# Allegro board fmc_tlu_v1_09.brd
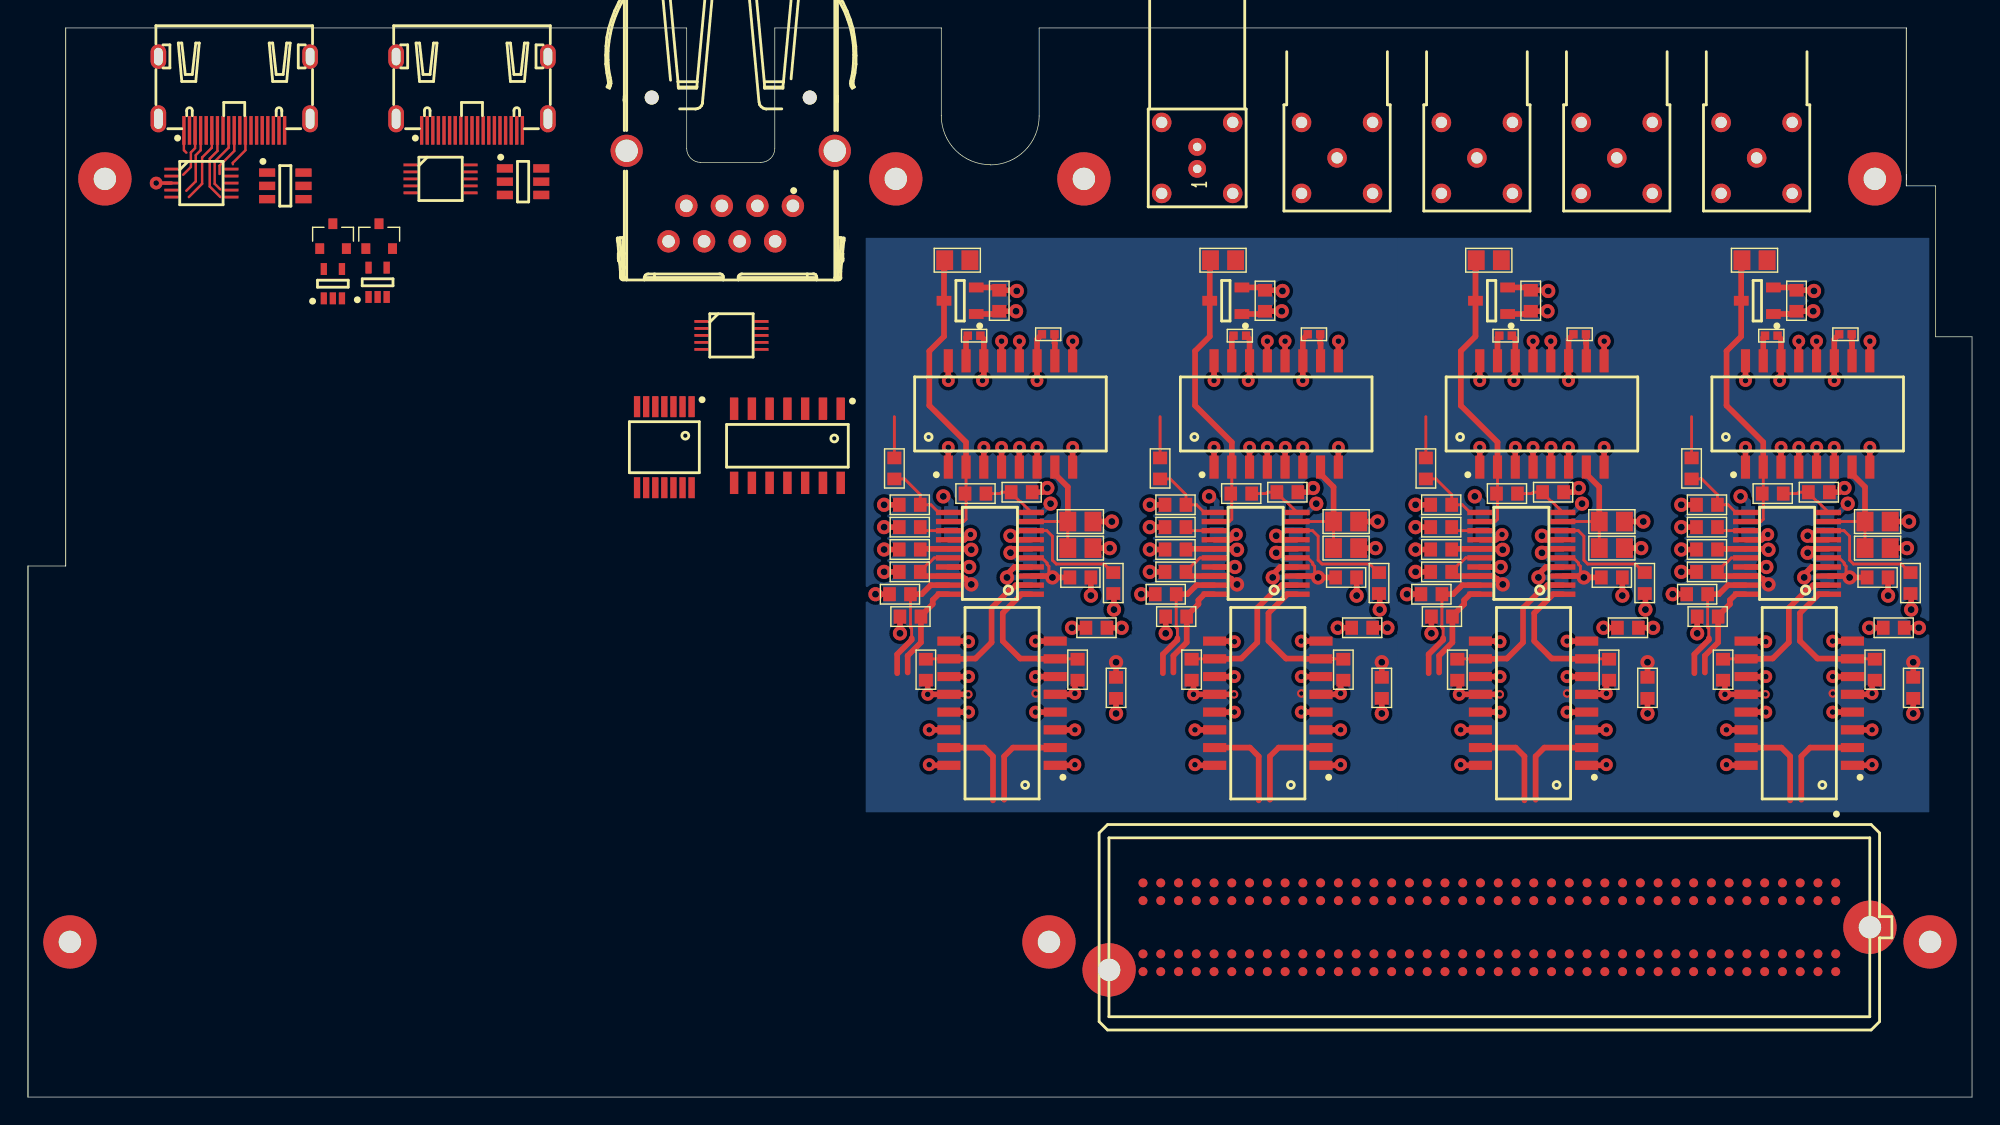
[diagram p0: board, top side]
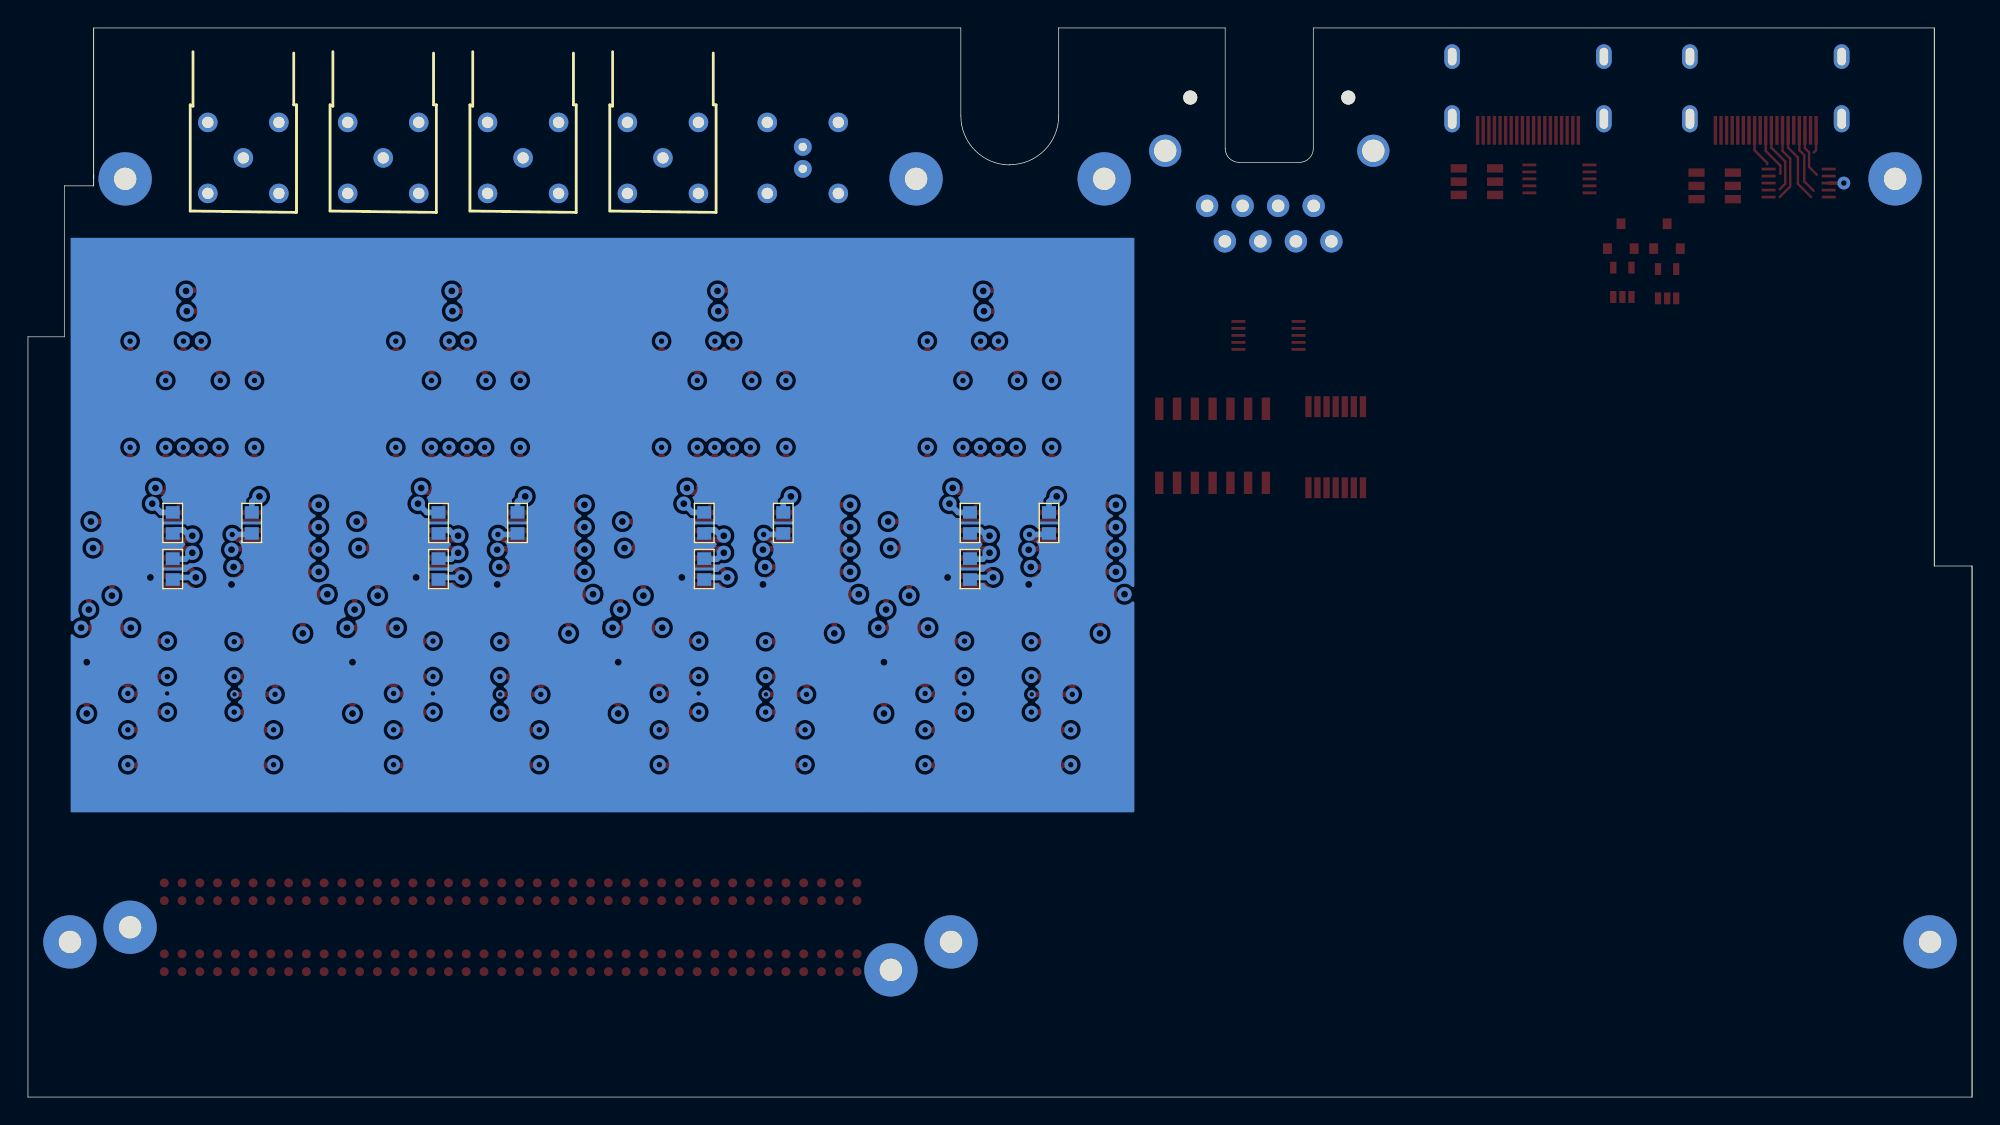
[diagram p1: board, bottom side, seen from below]

Outline 139 x 76.5 mm; copper layers: TOP, LAYER2, LAYER3, LAYER4, LAYER5, BOTTOM. Coordinates in mm from the lower left corner of the outline.
Outline path: 0,38 0,0 ; 0,38 2.7,38 ; 0,38 0,0 ; 0,0 139,0 139,54.4 136.4,54.4 136.4,65.2 134.3,65.2 ; 2.7,38 2.7,76.5 ; 2.7,38 2.7,76.5 ; 2.7,76.5 47.1,76.5 47.1,67.88 arc(47.39,67.17) 48.1,66.88 52.4,66.88 arc(53.1,67.17) 53.4,67.88 53.4,76.5 65.3,76.5 65.3,70.21 arc(66.33,67.74) 68.81,66.72 ; 134.3,76.5 72.3,76.5 72.3,70.2 arc(71.27,67.73) 68.8,66.7 ; 134.3,76.5 134.3,65.7 ; 134.3,76.5 134.3,65.2 ; 134.3,65.2 134.3,66

## Design rules (mm)
constraint set DEFAULT: min track width 0.17, pair gap 0.18
net group BEAM_TRIGGER: nets BEAM_TRIGGER<0> BEAM_TRIGGER<1> BEAM_TRIGGER<2> BEAM_TRIGGER<3>
net group BEAM_TRIGGER*: nets BEAM_TRIGGER*<0> BEAM_TRIGGER*<1> BEAM_TRIGGER*<2> BEAM_TRIGGER*<3>
net group BEAM_TRIGGER_CFD: nets BEAM_TRIGGER_CFD<0> BEAM_TRIGGER_CFD<1> BEAM_TRIGGER_CFD<2> BEAM_TRIGGER_CFD<3>
net group BEAM_TRIGGER_CFD*: nets BEAM_TRIGGER_CFD*<0> BEAM_TRIGGER_CFD*<1> BEAM_TRIGGER_CFD*<2> BEAM_TRIGGER_CFD*<3>
net group FMC_LA: nets FMC_LA<0> FMC_LA<1> FMC_LA<2> FMC_LA<3> FMC_LA<4> FMC_LA<5> FMC_LA<6> FMC_LA<7> FMC_LA<8> FMC_LA<9> FMC_LA<10> FMC_LA<11> FMC_LA<12> FMC_LA<13> FMC_LA<14> FMC_LA<15> FMC_LA<16> FMC_LA<17> FMC_LA<18> FMC_LA<19> FMC_LA<20> FMC_LA<21> FMC_LA<22> FMC_LA<23> FMC_LA<24> FMC_LA<25> FMC_LA<26> FMC_LA<27> FMC_LA<28> FMC_LA<29> FMC_LA<30> FMC_LA<31> FMC_LA<32> FMC_LA<33>
net group FMC_LA*: nets FMC_LA*<0> FMC_LA*<1> FMC_LA*<2> FMC_LA*<3> FMC_LA*<4> FMC_LA*<5> FMC_LA*<6> FMC_LA*<7> FMC_LA*<8> FMC_LA*<9> FMC_LA*<10> FMC_LA*<11> FMC_LA*<12> FMC_LA*<13> FMC_LA*<14> FMC_LA*<15> FMC_LA*<16> FMC_LA*<17> FMC_LA*<18> FMC_LA*<19> FMC_LA*<20> FMC_LA*<21> FMC_LA*<22> FMC_LA*<23> FMC_LA*<24> FMC_LA*<25> FMC_LA*<26> FMC_LA*<27> FMC_LA*<28> FMC_LA*<29> FMC_LA*<30> FMC_LA*<31> FMC_LA*<32> FMC_LA*<33>
net group IN: nets IN<0> IN<1> IN<2> IN<3>
net group VTHRESH: nets VTHRESH<0> VTHRESH<1> VTHRESH<2> VTHRESH<3>

## Placement (name value [footprint] x y rotation side)
C1_1  100nF  [C0603]  69.45 56.98 90 top
C1_2  100nF  [C0603]  88.45 56.98 90 top
C1_3  100nF  [C0603]  107.45 56.98 90 top
C1_4  100nF  [C0603]  126.45 56.98 90 top
C2_1  10nF  [C0603]  63.05 42.38 0 top
C2_2  10nF  [C0603]  82.05 42.38 0 top
C2_3  10nF  [C0603]  101.05 42.38 0 top
C2_4  10nF  [C0603]  120.05 42.38 0 top
C3_1  1.0uF  [C0603]  77.8 29.28 90 top
C3_2  1.0uF  [C0603]  96.8 29.28 90 top
C3_3  1.0uF  [C0603]  115.8 29.28 90 top
C3_4  1.0uF  [C0603]  134.8 29.28 90 top
C4_1  1.0uF  [C0603]  76.4 33.58 0 top
C4_2  1.0uF  [C0603]  95.4 33.58 0 top
C4_3  1.0uF  [C0603]  114.4 33.58 0 top
C4_4  1.0uF  [C0603]  133.4 33.58 0 top
C5_1  100nF  [C0603]  75.25 37.18 180 top
C5_2  100nF  [C0603]  94.25 37.18 180 top
C5_3  100nF  [C0603]  113.25 37.18 180 top
C5_4  100nF  [C0603]  132.25 37.18 180 top
C6_1  1.0uF  [C0603]  63.05 39.18 0 top
C6_2  1.0uF  [C0603]  82.05 39.18 0 top
C6_3  1.0uF  [C0603]  101.05 39.18 0 top
C6_4  1.0uF  [C0603]  120.05 39.18 0 top
C7_1  100nF  [C0603]  71.65 41.08 270 bottom
C7_2  100nF  [C0603]  90.65 41.08 270 bottom
C7_3  100nF  [C0603]  109.65 41.08 270 bottom
C7_4  100nF  [C0603]  128.65 41.08 270 bottom
C8_1  100nF  [C0603]  63.05 37.58 0 top
C8_2  100nF  [C0603]  82.05 37.58 0 top
C8_3  100nF  [C0603]  101.05 37.58 0 top
C8_4  100nF  [C0603]  120.05 37.58 0 top
C9_1  100nF  [C0603]  71.65 37.78 90 bottom
C9_2  100nF  [C0603]  90.65 37.78 90 bottom
C9_3  100nF  [C0603]  109.65 37.78 90 bottom
C9_4  100nF  [C0603]  128.65 37.78 90 bottom
C10_1  100nF  [C0603]  66 41.08 270 bottom
C10_2  100nF  [C0603]  85 41.08 270 bottom
C10_3  100nF  [C0603]  104 41.08 270 bottom
C10_4  100nF  [C0603]  123 41.08 270 bottom
D1_1  -  [SOT95P240X130-3N]  66.65 56.98 180 top
D1_2  -  [SOT95P240X130-3N]  85.65 56.98 180 top
D1_3  -  [SOT95P240X130-3N]  104.65 56.98 180 top
D1_4  -  [SOT95P240X130-3N]  123.65 56.98 180 top
IC1  -  [SOP65P640X120-14N]  45.5 46.5 270 top
IC1_1  -  [SOIC127P835X237-16N]  70.25 48.88 90 top
IC1_2  -  [SOIC127P835X237-16N]  89.25 48.88 90 top
IC1_3  -  [SOIC127P835X237-16N]  108.25 48.88 90 top
IC1_4  -  [SOIC127P835X237-16N]  127.25 48.88 90 top
IC2  -  [SOIC127P600X175-14N]  54.3 46.6 270 top
IC2_1  -  [TSSOP20MA_065]  71.75 35.98 90 top
IC2_2  -  [TSSOP20MA_065]  90.75 35.98 90 top
IC2_3  -  [TSSOP20MA_065]  109.75 35.98 90 top
IC2_4  -  [TSSOP20MA_065]  128.75 35.98 90 top
IC3  -  [SOT95P280X145-6N]  18.4 65.2 0 top
IC3_1  -  [SOIC127P835X237-16N]  69.65 28.18 180 top
IC3_2  -  [SOIC127P835X237-16N]  88.65 28.18 180 top
IC3_3  -  [SOIC127P835X237-16N]  107.65 28.18 180 top
IC3_4  -  [SOIC127P835X237-16N]  126.65 28.18 180 top
IC4  -  [SOT65P210X110-5N]  21.8 58.2 90 top
IC5  -  [SOT95P280X145-6N]  35.4 65.5 0 top
IC6  -  [SOT65P210X110-5N]  25 58.3 90 top
J1  -  [SAMTEC_MHDMI-19]  14.75 69.17 0 top
J2  -  [SAMTEC_MHDMI-19]  31.75 69.17 0 top
J3  -  [MOLEX_44661-1011]  50.25 68.86 270 top
J4  -  [SAMTEC_ASP-134606-01]  104.49 12.15 0 top
NOREF  -  [unnamed]  5.5 65.7 0 top
NOREF#2  -  [unnamed]  131.7 12.15 0 top
NOREF#3  -  [unnamed]  73 11.1 0 top
NOREF#4  -  [unnamed]  136 11.1 0 top
NOREF#5  -  [unnamed]  3 11.1 0 top
NOREF#6  -  [unnamed]  132.05 65.7 0 top
NOREF#7  -  [unnamed]  77.3 9.1 0 top
NOREF#8  -  [unnamed]  75.5 65.7 0 top
NOREF#9  -  [unnamed]  62.05 65.7 0 top
PX1  -  [LEMOEPG00_302]  83.6 66.56 90 top
PX2  -  [PLEMO80]  93.6 67.2 90 top
PX3  -  [PLEMO80]  103.6 67.2 90 top
PX4  -  [PLEMO80]  113.6 67.2 90 top
PX5  -  [PLEMO80]  123.6 67.2 90 top
R1_1  51  [C0402]  67.65 54.48 180 top
R1_2  51  [C0402]  86.65 54.48 180 top
R1_3  51  [C0402]  105.65 54.48 180 top
R1_4  51  [C0402]  124.65 54.48 180 top
R2_1  12  [C0805]  66.45 59.88 180 top
R2_2  12  [C0805]  85.45 59.88 180 top
R2_3  12  [C0805]  104.45 59.88 180 top
R2_4  12  [C0805]  123.45 59.88 180 top
R3_1  51  [C0603]  67.75 43.18 0 top
R3_2  51  [C0603]  86.75 43.18 0 top
R3_3  51  [C0603]  105.75 43.18 0 top
R3_4  51  [C0603]  124.75 43.18 0 top
R4_1  51  [C0402]  72.95 54.58 0 top
R4_2  51  [C0402]  91.95 54.58 0 top
R4_3  51  [C0402]  110.95 54.58 0 top
R4_4  51  [C0402]  129.95 54.58 0 top
R5_1  100  [C0603]  61.95 44.98 270 top
R5_2  100  [C0603]  80.95 44.98 270 top
R5_3  100  [C0603]  99.95 44.98 270 top
R5_4  100  [C0603]  118.95 44.98 270 top
R6_1  100  [C0805]  75.25 41.18 180 top
R6_2  100  [C0805]  94.25 41.18 180 top
R6_3  100  [C0805]  113.25 41.18 180 top
R6_4  100  [C0805]  132.25 41.18 180 top
R7_1  100  [C0603]  71.05 43.28 180 top
R7_2  100  [C0603]  90.05 43.28 180 top
R7_3  100  [C0603]  109.05 43.28 180 top
R7_4  100  [C0603]  128.05 43.28 180 top
R8_1  100  [C0805]  75.25 39.28 180 top
R8_2  100  [C0805]  94.25 39.28 180 top
R8_3  100  [C0805]  113.25 39.28 180 top
R8_4  100  [C0805]  132.25 39.28 180 top
R9_1  33k  [C0603]  63.05 40.78 0 top
R9_2  33k  [C0603]  82.05 40.78 0 top
R9_3  33k  [C0603]  101.05 40.78 0 top
R9_4  33k  [C0603]  120.05 40.78 0 top
R10_1  XX  [C0603]  77.6 36.78 90 top
R10_2  XX  [C0603]  96.6 36.78 90 top
R10_3  XX  [C0603]  115.6 36.78 90 top
R10_4  XX  [C0603]  134.6 36.78 90 top
R11_1  75  [C0603]  62.35 35.98 0 top
R11_2  75  [C0603]  81.35 35.98 0 top
R11_3  75  [C0603]  100.35 35.98 0 top
R11_4  75  [C0603]  119.35 35.98 0 top
R12_1  75  [C0603]  64.2 30.58 90 top
R12_2  75  [C0603]  83.2 30.58 90 top
R12_3  75  [C0603]  102.2 30.58 90 top
R12_4  75  [C0603]  121.2 30.58 90 top
R13_1  75  [C0603]  63.1 34.38 0 top
R13_2  75  [C0603]  82.1 34.38 0 top
R13_3  75  [C0603]  101.1 34.38 0 top
R13_4  75  [C0603]  120.1 34.38 0 top
R14_1  75  [C0603]  75.05 30.58 90 top
R14_2  75  [C0603]  94.05 30.58 90 top
R14_3  75  [C0603]  113.05 30.58 90 top
R14_4  75  [C0603]  132.05 30.58 90 top
T1  -  [SOT23]  21.8 61.6 90 top
T2  -  [SOT23]  25.1 61.6 90 top
U1  -  [SOT552-1]  12.4 65.4 0 top
U2  -  [SOT552-1]  50.3 54.5 0 top
U3  -  [SOT552-1]  29.5 65.7 0 top

## Library data of the parts
C1_1-C1_4 C5_1-C5_4 C7_1-C7_4 C8_1-C8_4 C9_1-C9_4 C10_1-C10_4 = CAPCERSMDCL2: part number: CAPCERSMDCL2_0603-100NF,16V; tolerance: 10%
C2_1-C2_4 = CAPCERSMDCL2: part number: CAPCERSMDCL2_0603-10NF,50V; tolerance: 10%
C3_1-C3_4 C4_1-C4_4 C6_1-C6_4 = CAPCERSMDCL2: part number: CAPCERSMDCL2_0603-1.0UF,6.3V; tolerance: 10%
D1_1-D1_4 = DIODE_DUAL_SERIES: part number: HBAT-540C
IC1 = AD5665R: part number: AD5665RBRUZ-1
IC1_1-IC1_4 = DELAY_LINE_GL2L: part number: GL2L5LS050D-C
IC2 = OPA4277: part number: OPA4277UA
IC2_1-IC2_4 = MAX9601
IC3 IC5 = USBLC6-2: part number: USBLC6-2SC6
IC3_1-IC3_4 = DELAY_LINE_GL2L: part number: GL2L5LS100D-C
IC4 IC6 = 74LVC1G07: part number: SN74LVC1G07DCK
J1 J2 = CON19P: part number: MHDMI-19-02-H-TH-L-TR
J3 = CON8P: part number: CON8P-MOLEX_44661-1011
J4 = CON160P_40CDGH: part number: ASP-134606-01
PX1 = PLEMO2CI: part number: PLEMO2CI-PLEMO2-00B
PX2-PX5 = PCOAX: part number: PCOAX-PLEMO00C
R1_1-R1_4 R4_1-R4_4 = RSMD0402: part number: RSMD0402_1/16W-51,1%; tolerance: 1%
R2_1-R2_4 = RSMD0805: part number: RSMD0805_125MW-12,1%; tolerance: 1%
R3_1-R3_4 = RSMD0603: part number: RSMD0603_1/10W-51,1%; tolerance: 1%
R5_1-R5_4 R7_1-R7_4 = RSMD0603: part number: RSMD0603_1/10W-100,1%; tolerance: 1%
R6_1-R6_4 R8_1-R8_4 = RSMD0805: part number: RSMD0805_125MW-100,1%; tolerance: 1%
R9_1-R9_4 = RSMD0603: part number: RSMD0603_1/10W-33K,1%; tolerance: 1%
R10_1-R10_4 = RSMD0603: part number: RSMD0603_1/10W-XX,1%; tolerance: 1%
R11_1-R11_4 R12_1-R12_4 R13_1-R13_4 R14_1-R14_4 = RSMD0603: part number: RSMD0603_1/10W-75,1%; tolerance: 1%
T1 T2 = TRANS MOSFET: part number: TRANS MOSFET_GSD-FDV301N,SOT23
U1-U3 = PRTR5V0U8S: part number: PRTR5V0U8S_TSSOP-NXP

## Footprints (pads in the part's own frame, mm; a bottom-side part is the same pattern mirrored in y, then rotated)
C0402
  rect 0.6x0.6 smd: 1(-0.45,0) 2(0.45,0)
C0603
  rect 0.9x1 smd: 1(-0.75,0) 2(0.75,0)
C0805
  rect 1.2x1.4 smd: 1(-0.9,0) 2(0.9,0)
LEMOEPG00_302
  round 1.27 hole 0.6: 1(-0.15,0) 2(1.42,0)
  round 1.397 hole 0.813: 3(-1.905,-2.54) 4(3.175,-2.54) 5(3.175,2.54) 6(-1.905,2.54)
MOLEX_44661-1011
  round 1 hole 3.25 unplated: (-2.66,5.65) (-2.66,-5.65)
  round 1.6 hole 0.9: 1(5.09,4.445) 2(7.63,3.175) 3(5.09,1.905) 4(7.63,0.635) 5(5.09,-0.635) 6(7.63,-1.905) 7(5.09,-3.175) 8(7.63,-4.445)
  round 2.301 hole 1.6: 9(1.15,7.44) 10(1.15,-7.44)
PLEMO80
  round 1.397 hole 0.813: 1(0,0) 2(2.54,-2.54) 3(2.54,2.54) 4(-2.54,2.54) 5(-2.54,-2.54)
SAMTEC_ASP-134606-01
  round 1.001 hole 1.3 unplated: (-27.19,-3.05) (27.19,0)
  round 0.64 smd: C1(24.765,3.175) C2(23.495,3.175) C3(22.225,3.175) C4(20.955,3.175) C5(19.685,3.175) C6(18.415,3.175) C7(17.145,3.175) C8(15.875,3.175) C9(14.605,3.175) C10(13.335,3.175) C11(12.065,3.175) C12(10.795,3.175) C13(9.525,3.175) C14(8.255,3.175) C15(6.985,3.175) C16(5.715,3.175) C17(4.445,3.175) C18(3.175,3.175) C19(1.905,3.175) C20(0.635,3.175) C21(-0.635,3.175) C22(-1.905,3.175) C23(-3.175,3.175) C24(-4.445,3.175) C25(-5.715,3.175) C26(-6.985,3.175) C27(-8.255,3.175) C28(-9.525,3.175) C29(-10.795,3.175) C30(-12.065,3.175) C31(-13.335,3.175) C32(-14.605,3.175) C33(-15.875,3.175) C34(-17.145,3.175) C35(-18.415,3.175) C36(-19.685,3.175) C37(-20.955,3.175) C38(-22.225,3.175) C39(-23.495,3.175) C40(-24.765,3.175) D1(24.765,1.905) D2(23.495,1.905) D3(22.225,1.905) D4(20.955,1.905) D5(19.685,1.905) D6(18.415,1.905) D7(17.145,1.905) D8(15.875,1.905) D9(14.605,1.905) D10(13.335,1.905) D11(12.065,1.905) D12(10.795,1.905) D13(9.525,1.905) D14(8.255,1.905) D15(6.985,1.905) D16(5.715,1.905) D17(4.445,1.905) D18(3.175,1.905) D19(1.905,1.905) D20(0.635,1.905) D21(-0.635,1.905) D22(-1.905,1.905) D23(-3.175,1.905) D24(-4.445,1.905) D25(-5.715,1.905) D26(-6.985,1.905) D27(-8.255,1.905) D28(-9.525,1.905) D29(-10.795,1.905) D30(-12.065,1.905) D31(-13.335,1.905) D32(-14.605,1.905) D33(-15.875,1.905) D34(-17.145,1.905) D35(-18.415,1.905) D36(-19.685,1.905) D37(-20.955,1.905) D38(-22.225,1.905) D39(-23.495,1.905) D40(-24.765,1.905) G1(24.765,-1.905) G2(23.495,-1.905) G3(22.225,-1.905) G4(20.955,-1.905) G5(19.685,-1.905) G6(18.415,-1.905) G7(17.145,-1.905) G8(15.875,-1.905) G9(14.605,-1.905) G10(13.335,-1.905) G11(12.065,-1.905) G12(10.795,-1.905) G13(9.525,-1.905) G14(8.255,-1.905) G15(6.985,-1.905) G16(5.715,-1.905) G17(4.445,-1.905) G18(3.175,-1.905) G19(1.905,-1.905) G20(0.635,-1.905) G21(-0.635,-1.905) G22(-1.905,-1.905) G23(-3.175,-1.905) G24(-4.445,-1.905) G25(-5.715,-1.905) G26(-6.985,-1.905) G27(-8.255,-1.905) G28(-9.525,-1.905) G29(-10.795,-1.905) G30(-12.065,-1.905) G31(-13.335,-1.905) G32(-14.605,-1.905) G33(-15.875,-1.905) G34(-17.145,-1.905) G35(-18.415,-1.905) G36(-19.685,-1.905) G37(-20.955,-1.905) G38(-22.225,-1.905) G39(-23.495,-1.905) G40(-24.765,-1.905) H1(24.765,-3.175) H2(23.495,-3.175) H3(22.225,-3.175) H4(20.955,-3.175) H5(19.685,-3.175) H6(18.415,-3.175) H7(17.145,-3.175) H8(15.875,-3.175) H9(14.605,-3.175) H10(13.335,-3.175) H11(12.065,-3.175) H12(10.795,-3.175) H13(9.525,-3.175) H14(8.255,-3.175) H15(6.985,-3.175) H16(5.715,-3.175) H17(4.445,-3.175) H18(3.175,-3.175) H19(1.905,-3.175) H20(0.635,-3.175) H21(-0.635,-3.175) H22(-1.905,-3.175) H23(-3.175,-3.175) H24(-4.445,-3.175) H25(-5.715,-3.175) H26(-6.985,-3.175) H27(-8.255,-3.175) H28(-9.525,-3.175) H29(-10.795,-3.175) H30(-12.065,-3.175) H31(-13.335,-3.175) H32(-14.605,-3.175) H33(-15.875,-3.175) H34(-17.145,-3.175) H35(-18.415,-3.175) H36(-19.685,-3.175) H37(-20.955,-3.175) H38(-22.225,-3.175) H39(-23.495,-3.175) H40(-24.765,-3.175)
SAMTEC_MHDMI-19
  rect 0.24x2.05 smd: 1(-3.6,0) 2(-3.2,0) 3(-2.8,0) 4(-2.4,0) 5(-2,0) 6(-1.6,0) 7(-1.2,0) 8(-0.8,0) 9(-0.4,0) 10(0,0) 11(0.4,0) 12(0.8,0) 13(1.2,0) 14(1.6,0) 15(2,0) 16(2.4,0) 17(2.8,0) 18(3.2,0) 19(3.6,0)
  oval 1.12x1.94 hole 0.62x1.44: 20(-5.425,0.83) 21(5.425,0.83)
  oval 1.12x1.76 hole 0.62x1.26: 22(-5.425,5.28) 23(5.425,5.28)
SOIC127P600X175-14N
  rect 1.6x0.6 smd: 1(-2.65,3.81) 2(-2.65,2.54) 3(-2.65,1.27) 4(-2.65,0) 5(-2.65,-1.27) 6(-2.65,-2.54) 7(-2.65,-3.81) 8(2.65,-3.81) 9(2.65,-2.54) 10(2.65,-1.27) 11(2.65,0) 12(2.65,1.27) 13(2.65,2.54) 14(2.65,3.81)
SOIC127P835X237-16N
  rect 1.65x0.65 smd: 1(-3.8,4.445) 2(-3.8,3.175) 3(-3.8,1.905) 4(-3.8,0.635) 5(-3.8,-0.635) 6(-3.8,-1.905) 7(-3.8,-3.175) 8(-3.8,-4.445) 9(3.8,-4.445) 10(3.8,-3.175) 11(3.8,-1.905) 12(3.8,-0.635) 13(3.8,0.635) 14(3.8,1.905) 15(3.8,3.175) 16(3.8,4.445)
SOP65P640X120-14N
  rect 1.5x0.45 smd: 1(-2.9,1.95) 2(-2.9,1.3) 3(-2.9,0.65) 4(-2.9,0) 5(-2.9,-0.65) 6(-2.9,-1.3) 7(-2.9,-1.95) 8(2.9,-1.95) 9(2.9,-1.3) 10(2.9,-0.65) 11(2.9,0) 12(2.9,0.65) 13(2.9,1.3) 14(2.9,1.95)
SOT23
  rect 0.762x0.635 smd: 1(-0.889,0.94) 2(-0.889,-0.965) 3(0.889,0)
SOT65P210X110-5N
  rect 0.85x0.45 smd: 1(-1.05,0.65) 2(-1.05,0) 3(-1.05,-0.65) 4(1.05,-0.65) 5(1.05,0.65)
SOT95P240X130-3N
  rect 1.05x0.7 smd: 1(-1.15,0.95) 2(-1.15,-0.95) 3(1.15,0)
SOT95P280X145-6N
  rect 1.15x0.6 smd: 1(-1.3,0.95) 2(-1.3,0) 3(-1.3,-0.95) 4(1.3,-0.95) 5(1.3,0) 6(1.3,0.95)
SOT552-1
  rect 1x0.2 smd: 1(-2.15,1) 2(-2.15,0.5) 3(-2.15,0) 4(-2.15,-0.5) 5(-2.15,-1) 6(2.15,-1) 7(2.15,-0.5) 8(2.15,0) 9(2.15,0.5) 10(2.15,1)
TSSOP20MA_065
  rect 0.381x1.778 smd: 1(0,0) 2(0.65,0) 3(1.3,0) 4(1.95,0) 5(2.6,0) 6(3.25,0) 7(3.9,0) 8(4.55,0) 9(5.2,0) 10(5.85,0) 11(5.85,5.94) 12(5.2,5.94) 13(4.55,5.94) 14(3.9,5.94) 15(3.25,5.94) 16(2.6,5.94) 17(1.95,5.94) 18(1.3,5.94) 19(0.65,5.94) 20(0,5.94)
unnamed
  round 3.81 hole 1.6: (0,0)

## Nets
GND_HDMI1: J1.20 J1.21 J1.22 J1.23
GND_HDMI2: J2.20 J2.21 J2.22 J2.23
GND_SIGNAL: C2_1.1(A<0>) C2_2.1(A<0>) C2_3.1(A<0>) C2_4.1(A<0>) C3_1.1(A<0>) C3_2.1(A<0>) C3_3.1(A<0>) C3_4.1(A<0>) C4_1.1(A<0>) C4_2.1(A<0>) C4_3.1(A<0>) C4_4.1(A<0>) C5_1.1(A<0>) C5_2.1(A<0>) C5_3.1(A<0>) C5_4.1(A<0>) C6_1.1(A<0>) C6_2.1(A<0>) C6_3.1(A<0>) C6_4.1(A<0>) C7_1.1(A<0>) C7_2.1(A<0>) C7_3.1(A<0>) C7_4.1(A<0>) C8_1.1(A<0>) C8_2.1(A<0>) C8_3.1(A<0>) C8_4.1(A<0>) C9_1.1(A<0>) C9_2.1(A<0>) C9_3.1(A<0>) C9_4.1(A<0>) C10_1.1(A<0>) C10_2.1(A<0>) C10_3.1(A<0>) C10_4.1(A<0>) IC1.1(LDAC*) IC1.2(ADDR1) IC1.8(ADDR2) IC1.12 IC1_1.1(SH<0>) IC1_1.3(SH<1>) IC1_1.4(SH<2>) IC1_1.5(SH<3>) IC1_1.6(SH<4>) IC1_1.8(SH<5>) IC1_1.9(SH<6>) IC1_1.11(SH<7>) IC1_1.12(SH<8>) IC1_1.13(SH<9>) IC1_1.14(SH<10>) IC1_1.16(SH<11>) IC1_2.1(SH<0>) IC1_2.3(SH<1>) IC1_2.4(SH<2>) IC1_2.5(SH<3>) IC1_2.6(SH<4>) IC1_2.8(SH<5>) IC1_2.9(SH<6>) IC1_2.11(SH<7>) IC1_2.12(SH<8>) IC1_2.13(SH<9>) IC1_2.14(SH<10>) IC1_2.16(SH<11>) IC1_3.1(SH<0>) IC1_3.3(SH<1>) IC1_3.4(SH<2>) IC1_3.5(SH<3>) IC1_3.6(SH<4>) IC1_3.8(SH<5>) IC1_3.9(SH<6>) IC1_3.11(SH<7>) IC1_3.12(SH<8>) IC1_3.13(SH<9>) IC1_3.14(SH<10>) IC1_3.16(SH<11>) IC1_4.1(SH<0>) IC1_4.3(SH<1>) IC1_4.4(SH<2>) IC1_4.5(SH<3>) IC1_4.6(SH<4>) IC1_4.8(SH<5>) IC1_4.9(SH<6>) IC1_4.11(SH<7>) IC1_4.12(SH<8>) IC1_4.13(SH<9>) IC1_4.14(SH<10>) IC1_4.16(SH<11>) IC2_1.4(LE<0>) IC2_1.17(LE<0>) IC2_2.4(LE<0>) IC2_2.17(LE<0>) IC2_3.4(LE<0>) IC2_3.17(LE<0>) IC2_4.4(LE<0>) IC2_4.17(LE<0>) IC3.2(GND) IC3_1.1(SH<0>) IC3_1.3(SH<1>) IC3_1.4(SH<2>) IC3_1.5(SH<3>) IC3_1.6(SH<4>) IC3_1.8(SH<5>) IC3_1.9(SH<6>) IC3_1.11(SH<7>) IC3_1.12(SH<8>) IC3_1.13(SH<9>) IC3_1.14(SH<10>) IC3_1.16(SH<11>) IC3_2.1(SH<0>) IC3_2.3(SH<1>) IC3_2.4(SH<2>) IC3_2.5(SH<3>) IC3_2.6(SH<4>) IC3_2.8(SH<5>) IC3_2.9(SH<6>) IC3_2.11(SH<7>) IC3_2.12(SH<8>) IC3_2.13(SH<9>) IC3_2.14(SH<10>) IC3_2.16(SH<11>) IC3_3.1(SH<0>) IC3_3.3(SH<1>) IC3_3.4(SH<2>) IC3_3.5(SH<3>) IC3_3.6(SH<4>) IC3_3.8(SH<5>) IC3_3.9(SH<6>) IC3_3.11(SH<7>) IC3_3.12(SH<8>) IC3_3.13(SH<9>) IC3_3.14(SH<10>) IC3_3.16(SH<11>) IC3_4.1(SH<0>) IC3_4.3(SH<1>) IC3_4.4(SH<2>) IC3_4.5(SH<3>) IC3_4.6(SH<4>) IC3_4.8(SH<5>) IC3_4.9(SH<6>) IC3_4.11(SH<7>) IC3_4.12(SH<8>) IC3_4.13(SH<9>) IC3_4.14(SH<10>) IC3_4.16(SH<11>) IC4.3 IC5.2(GND) IC6.3 J1.2(A<1>) J1.5(A<4>) J1.8(A<7>) J1.11(A<10>) J1.17(A<16>) J2.2(A<1>) J2.5(A<4>) J2.8(A<7>) J2.11(A<10>) J2.17(A<16>) J4.C1(C<1>) J4.C4(C<4>) J4.C5(C<5>) J4.C8(C<8>) J4.C9(C<9>) J4.C12(C<12>) J4.C13(C<13>) J4.C16(C<16>) J4.C17(C<17>) J4.C20(C<20>) J4.C21(C<21>) J4.C24(C<24>) J4.C25(C<25>) J4.C28(C<28>) J4.C29(C<29>) J4.C32(C<32>) J4.C33(C<33>) J4.C36(C<36>) J4.C38(C<38>) J4.C40(C<40>) J4.D2(D<2>) J4.D3(D<3>) J4.D6(D<6>) J4.D7(D<7>) J4.D10(D<10>) J4.D13(D<13>) J4.D16(D<16>) J4.D19(D<19>) J4.D22(D<22>) J4.D25(D<25>) J4.D28(D<28>) J4.D37(D<37>) J4.D39(D<39>) J4.G1(G<1>) J4.G4(G<4>) J4.G5(G<5>) J4.G8(G<8>) J4.G11(G<11>) J4.G14(G<14>) J4.G17(G<17>) J4.G20(G<20>) J4.G23(G<23>) J4.G26(G<26>) J4.G29(G<29>) J4.G32(G<32>) J4.G35(G<35>) J4.G38(G<38>) J4.G40(G<40>) J4.H3(H<3>) J4.H6(H<6>) J4.H9(H<9>) J4.H12(H<12>) J4.H15(H<15>) J4.H18(H<18>) J4.H21(H<21>) J4.H24(H<24>) J4.H27(H<27>) J4.H30(H<30>) J4.H33(H<33>) J4.H36(H<36>) J4.H39(H<39>) PX1.3 PX1.4 PX1.5 PX1.6 PX2.2 PX2.3 PX2.4 PX2.5 PX3.2 PX3.3 PX3.4 PX3.5 PX4.2 PX4.3 PX4.4 PX4.5 PX5.2 PX5.3 PX5.4 PX5.5 R1_1.1(A<0>) R1_2.1(A<0>) R1_3.1(A<0>) R1_4.1(A<0>) R4_1.1(A<0>) R4_2.1(A<0>) R4_3.1(A<0>) R4_4.1(A<0>) R6_1.1(A<0>) R6_2.1(A<0>) R6_3.1(A<0>) R6_4.1(A<0>) R7_1.1(A<0>) R7_2.1(A<0>) R7_3.1(A<0>) R7_4.1(A<0>) R8_1.1(A<0>) R8_2.1(A<0>) R8_3.1(A<0>) R8_4.1(A<0>) R9_1.1(A<0>) R9_2.1(A<0>) R9_3.1(A<0>) R9_4.1(A<0>) R10_1.1(A<0>) R10_2.1(A<0>) R10_3.1(A<0>) R10_4.1(A<0>) R11_1.1(A<0>) R11_2.1(A<0>) R11_3.1(A<0>) R11_4.1(A<0>) R12_1.1(A<0>) R12_2.1(A<0>) R12_3.1(A<0>) R12_4.1(A<0>) R13_1.1(A<0>) R13_2.1(A<0>) R13_3.1(A<0>) R13_4.1(A<0>) R14_1.1(A<0>) R14_2.1(A<0>) R14_3.1(A<0>) R14_4.1(A<0>)
P2V5: C3_1.2(B<0>) C3_2.2(B<0>) C3_3.2(B<0>) C3_4.2(B<0>) C5_1.2(B<0>) C5_2.2(B<0>) C5_3.2(B<0>) C5_4.2(B<0>) C8_1.2(B<0>) C8_2.2(B<0>) C8_3.2(B<0>) C8_4.2(B<0>) IC2_1.3(VCCO_<0>) IC2_1.5(LE*<0>) IC2_1.16(LE*<0>) IC2_1.18(VCCO_<1>) IC2_2.3(VCCO_<0>) IC2_2.5(LE*<0>) IC2_2.16(LE*<0>) IC2_2.18(VCCO_<1>) IC2_3.3(VCCO_<0>) IC2_3.5(LE*<0>) IC2_3.16(LE*<0>) IC2_3.18(VCCO_<1>) IC2_4.3(VCCO_<0>) IC2_4.5(LE*<0>) IC2_4.16(LE*<0>) IC2_4.18(VCCO_<1>) IC3.5(VBUS) IC4.5 IC5.5(VBUS) IC6.5 J4.G39(G<39>) J4.H40(H<40>)
P3V3: IC1.3 IC1.6(POR) IC1.9(CLR*) J4.C39(C<39>) J4.D32(D<32>) J4.D36(D<36>) J4.D38(D<38>) J4.D40(D<40>) T1.3(D) T2.3(D)
P5V: C1_1.2(B<0>) C1_2.2(B<0>) C1_3.2(B<0>) C1_4.2(B<0>) C4_1.2(B<0>) C4_2.2(B<0>) C4_3.2(B<0>) C4_4.2(B<0>) C7_1.2(B<0>) C7_2.2(B<0>) C7_3.2(B<0>) C7_4.2(B<0>) C10_1.2(B<0>) C10_2.2(B<0>) C10_3.2(B<0>) C10_4.2(B<0>) D1_1.2(C) D1_2.2(C) D1_3.2(C) D1_4.2(C) IC2.4(V+) IC2_1.7(VCC<0>) IC2_1.14(VCC<1>) IC2_2.7(VCC<0>) IC2_2.14(VCC<1>) IC2_3.7(VCC<0>) IC2_3.14(VCC<1>) IC2_4.7(VCC<0>) IC2_4.14(VCC<1>)
P12V: J4.C35(C<35>) J4.C37(C<37>)
VBUS: U1.8 U2.8 U3.8
BEAM_TRIGGER*<0>: IC2_4.19(Q*<0>) R11_4.2(B<0>)
BEAM_TRIGGER*<1>: IC2_3.19(Q*<0>) R11_3.2(B<0>)
BEAM_TRIGGER*<2>: IC2_2.19(Q*<0>) R11_2.2(B<0>)
BEAM_TRIGGER*<3>: IC2_1.19(Q*<0>) R11_1.2(B<0>)
BEAM_TRIGGER<0>: IC2_4.20(Q<0>) R13_4.2(B<0>)
BEAM_TRIGGER<1>: IC2_3.20(Q<0>) R13_3.2(B<0>)
BEAM_TRIGGER<2>: IC2_2.20(Q<0>) R13_2.2(B<0>)
BEAM_TRIGGER<3>: IC2_1.20(Q<0>) R13_1.2(B<0>)
BEAM_TRIGGER_CFD*<0>: IC3_4.15(A2)
BEAM_TRIGGER_CFD*<1>: IC3_3.15(A2)
BEAM_TRIGGER_CFD*<2>: IC3_2.15(A2)
BEAM_TRIGGER_CFD*<3>: IC3_1.15(A2)
BEAM_TRIGGER_CFD<0>: IC3_4.2(A1)
BEAM_TRIGGER_CFD<1>: IC3_3.2(A1)
BEAM_TRIGGER_CFD<2>: IC3_2.2(A1)
BEAM_TRIGGER_CFD<3>: IC3_1.2(A1)
BUS_GND: U1.3 U2.3 U3.3
BUSY0: J3.6(A<5>) U2.4(IN)
BUSY0*: J3.3(A<2>) U2.7(IN)
BUSY1: J1.7(A<6>) U1.6(IN)
BUSY1*: J1.9(A<8>) U1.7(IN)
BUSY2: J2.7(A<6>) U3.7(IN)
BUSY2*: J2.9(A<8>) U3.6(IN)
CLK1: J1.3(A<2>) U1.2(IN)
CLK1*: J1.1(A<0>) U1.1(IN)
CLK2: J2.3(A<2>) U3.4(IN)
CLK2*: J2.1(A<0>) U3.5(IN)
CONT0: J3.5(A<4>) U2.10(IN)
CONT0*: J3.4(A<3>) U2.6(IN)
CONT1: J1.4(A<3>) U1.4(IN)
CONT1*: J1.6(A<5>)
CONT2: J2.4(A<3>) U3.1(IN)
CONT2*: J2.6(A<5>) U3.2(IN)
DP0_C2M: J4.C2(C<2>)
DP0_C2M*: J4.C3(C<3>)
DP0_M2C: J4.C6(C<6>)
DP0_M2C*: J4.C7(C<7>)
DUT_CLK0: J3.2(A<1>) U2.9(IN)
DUT_CLK0*: J3.1(A<0>)
FMC_CLK1_M2C: J4.G2(G<2>)
FMC_CLK1_M2C*: J4.G3(G<3>)
FMC_LA*<0>: J4.G7(G<7>)
FMC_LA*<1>: J4.D9(D<9>)
FMC_LA*<2>: J4.H8(H<8>)
FMC_LA*<3>: J4.G10(G<10>)
FMC_LA*<4>: J4.H11(H<11>)
FMC_LA*<5>: J4.D12(D<12>)
FMC_LA*<6>: J4.C11(C<11>)
FMC_LA*<7>: J4.H14(H<14>)
FMC_LA*<8>: J4.G13(G<13>)
FMC_LA*<9>: J4.D15(D<15>)
FMC_LA*<10>: J4.C15(C<15>)
FMC_LA*<11>: J4.H17(H<17>)
FMC_LA*<12>: J4.G16(G<16>)
FMC_LA*<13>: J4.D18(D<18>)
FMC_LA*<14>: J4.C19(C<19>)
FMC_LA*<15>: J4.H20(H<20>)
FMC_LA*<16>: J4.G19(G<19>)
FMC_LA*<17>: J4.D21(D<21>)
FMC_LA*<18>: J4.C23(C<23>)
FMC_LA*<19>: J4.H23(H<23>)
FMC_LA*<20>: J4.G22(G<22>)
FMC_LA*<21>: J4.H26(H<26>)
FMC_LA*<22>: J4.G25(G<25>)
FMC_LA*<23>: J4.D24(D<24>)
FMC_LA*<24>: J4.H29(H<29>)
FMC_LA*<25>: J4.G28(G<28>)
FMC_LA*<26>: J4.D27(D<27>)
FMC_LA*<27>: J4.C27(C<27>)
FMC_LA*<28>: J4.H32(H<32>)
FMC_LA*<29>: J4.G31(G<31>)
FMC_LA*<30>: J4.H35(H<35>)
FMC_LA*<31>: J4.G34(G<34>)
FMC_LA*<32>: J4.H38(H<38>)
FMC_LA*<33>: J4.G37(G<37>)
FMC_LA<0>: J4.G6(G<6>)
FMC_LA<1>: J4.D8(D<8>)
FMC_LA<2>: J4.H7(H<7>)
FMC_LA<3>: J4.G9(G<9>)
FMC_LA<4>: J4.H10(H<10>)
FMC_LA<5>: J4.D11(D<11>)
FMC_LA<6>: J4.C10(C<10>)
FMC_LA<7>: J4.H13(H<13>)
FMC_LA<8>: J4.G12(G<12>)
FMC_LA<9>: J4.D14(D<14>)
FMC_LA<10>: J4.C14(C<14>)
FMC_LA<11>: J4.H16(H<16>)
FMC_LA<12>: J4.G15(G<15>)
FMC_LA<13>: J4.D17(D<17>)
FMC_LA<14>: J4.C18(C<18>)
FMC_LA<15>: J4.H19(H<19>)
FMC_LA<16>: J4.G18(G<18>)
FMC_LA<17>: J4.D20(D<20>)
FMC_LA<18>: J4.C22(C<22>)
FMC_LA<19>: J4.H22(H<22>)
FMC_LA<20>: J4.G21(G<21>)
FMC_LA<21>: J4.H25(H<25>)
FMC_LA<22>: J4.G24(G<24>)
FMC_LA<23>: J4.D23(D<23>)
FMC_LA<24>: J4.H28(H<28>)
FMC_LA<25>: J4.G27(G<27>)
FMC_LA<26>: J4.D26(D<26>)
FMC_LA<27>: J4.C26(C<26>)
FMC_LA<28>: J4.H31(H<31>)
FMC_LA<29>: J4.G30(G<30>)
FMC_LA<30>: J4.H34(H<34>)
FMC_LA<31>: J4.G33(G<33>)
FMC_LA<32>: J4.H37(H<37>)
FMC_LA<33>: J4.G36(G<36>)
FMC_PRSNT_M2C_L: J4.H2(H<2>)
FMC_PWR_GOOD_FLASH_RST_B: J4.D1(D<1>)
FMC_TCK_BUF: J4.D29(D<29>)
FMC_TDO: J4.D31(D<31>)
FMC_TMS_BUF: J4.D33(D<33>)
FPGA_TDO: J4.D30(D<30>)
FRAME: J3.9 J3.10
GA0: J4.C34(C<34>)
GA1: J4.D35(D<35>)
GBTCLK0_M2C: J4.D4(D<4>)
GBTCLK0_M2C*: J4.D5(D<5>)
HDMI_POWER_ENABLE1: IC4.2(A)
HDMI_POWER_ENABLE2: IC6.2(A)
IN<0>: PX5.1(A) R2_4.1(A<0>)
IN<1>: PX4.1(A) R2_3.1(A<0>)
IN<2>: PX3.1(A) R2_2.1(A<0>)
IN<3>: PX2.1(A) R2_1.1(A<0>)
M5V: C1_1.1(A<0>) C1_2.1(A<0>) C1_3.1(A<0>) C1_4.1(A<0>) C6_1.2(B<0>) C6_2.2(B<0>) C6_3.2(B<0>) C6_4.2(B<0>) C9_1.2(B<0>) C9_2.2(B<0>) C9_3.2(B<0>) C9_4.2(B<0>) D1_1.1(A) D1_2.1(A) D1_3.1(A) D1_4.1(A) IC2.11(V-) IC2_1.6(VEE<0>) IC2_1.15(VEE<1>) IC2_2.6(VEE<0>) IC2_2.15(VEE<1>) IC2_3.6(VEE<0>) IC2_3.15(VEE<1>) IC2_4.6(VEE<0>) IC2_4.15(VEE<1>)
SCL: IC1.14(SCL) J4.C30(C<30>)
SDA: IC1.13(SDA) J4.C31(C<31>)
SIG7: U1.5(IN)
SIG7_1: U2.5(IN)
SPARE1: J1.10(A<9>) U1.9(IN)
SPARE1*: J1.12(A<11>) U1.10(IN)
SPARE2: J2.10(A<9>) U3.9(IN)
SPARE2*: J2.12(A<11>) U3.10(IN)
TRIG0: J3.8(A<7>) U2.1(IN)
TRIG0*: J3.7(A<6>) U2.2(IN)
TRIG1: IC3.1(I/O11) IC3.3(I/O12) J1.15(A<14>)
TRIG1*: IC3.4(I/O22) IC3.6(I/O21) J1.16(A<15>)
TRIG2: IC5.1(I/O11) IC5.3(I/O12) J2.15(A<14>)
TRIG2*: IC5.4(I/O22) IC5.6(I/O21) J2.16(A<15>)
TRST_L: J4.D34(D<34>)
UNNAMED_1_AD5665R_I63_VOUTA: IC1.4(VOUTA) IC2.3(PIN<0>)
UNNAMED_1_AD5665R_I63_VOUTB: IC1.11(VOUTB) IC2.12(PIN<0>)
UNNAMED_1_AD5665R_I63_VOUTC: IC1.5(VOUTC) IC2.5(PIN<0>)
UNNAMED_1_AD5665R_I63_VOUTD: IC1.10(VOUTD) IC2.10(PIN<0>)
UNNAMED_1_CAPCERSMDCL2_I78_B_1: C2_1.2(B<0>) IC2_1.11(IN+<0>) R5_1.2(B<0>)
UNNAMED_1_CAPCERSMDCL2_I78_B_2: C2_2.2(B<0>) IC2_2.11(IN+<0>) R5_2.2(B<0>)
UNNAMED_1_CAPCERSMDCL2_I78_B_3: C2_3.2(B<0>) IC2_3.11(IN+<0>) R5_3.2(B<0>)
UNNAMED_1_CAPCERSMDCL2_I78_B_4: C2_4.2(B<0>) IC2_4.11(IN+<0>) R5_4.2(B<0>)
UNNAMED_1_DELAYLINEGL2L_I14_1_1: IC1_1.15(A2) R1_1.2(B<0>)
UNNAMED_1_DELAYLINEGL2L_I14_1_2: IC1_2.15(A2) R1_2.2(B<0>)
UNNAMED_1_DELAYLINEGL2L_I14_1_3: IC1_3.15(A2) R1_3.2(B<0>)
UNNAMED_1_DELAYLINEGL2L_I14_1_4: IC1_4.15(A2) R1_4.2(B<0>)
UNNAMED_1_DELAYLINEGL2L_I14_2_1: IC1_1.10(B2) R4_1.2(B<0>)
UNNAMED_1_DELAYLINEGL2L_I14_2_2: IC1_2.10(B2) R4_2.2(B<0>)
UNNAMED_1_DELAYLINEGL2L_I14_2_3: IC1_3.10(B2) R4_3.2(B<0>)
UNNAMED_1_DELAYLINEGL2L_I14_2_4: IC1_4.10(B2) R4_4.2(B<0>)
UNNAMED_1_DELAYLINEGL2L_I140__1: D1_1.3(AC) IC1_1.2(A1) IC2_1.12(IN-<0>) R2_1.2(B<0>) R3_1.1(A<0>)
UNNAMED_1_DELAYLINEGL2L_I140__2: D1_2.3(AC) IC1_2.2(A1) IC2_2.12(IN-<0>) R2_2.2(B<0>) R3_2.1(A<0>)
UNNAMED_1_DELAYLINEGL2L_I140__3: D1_3.3(AC) IC1_3.2(A1) IC2_3.12(IN-<0>) R2_3.2(B<0>) R3_3.1(A<0>)
UNNAMED_1_DELAYLINEGL2L_I140__4: D1_4.3(AC) IC1_4.2(A1) IC2_4.12(IN-<0>) R2_4.2(B<0>) R3_4.1(A<0>)
UNNAMED_1_MAX9601_I1_HYS_1: IC2_1.8(HYS<0>) R10_1.2(B<0>)
UNNAMED_1_MAX9601_I1_HYS_2: IC2_2.8(HYS<0>) R10_2.2(B<0>)
UNNAMED_1_MAX9601_I1_HYS_3: IC2_3.8(HYS<0>) R10_3.2(B<0>)
UNNAMED_1_MAX9601_I1_HYS_4: IC2_4.8(HYS<0>) R10_4.2(B<0>)
UNNAMED_1_MAX9601_I1_IN_1: IC2_1.10(IN+<0>) R3_1.2(B<0>) R7_1.2(B<0>)
UNNAMED_1_MAX9601_I1_IN_1_1: IC1_1.7(B1) IC2_1.9(IN-<0>) R6_1.2(B<0>) R8_1.2(B<0>)
UNNAMED_1_MAX9601_I1_IN_1_2: IC1_2.7(B1) IC2_2.9(IN-<0>) R6_2.2(B<0>) R8_2.2(B<0>)
UNNAMED_1_MAX9601_I1_IN_1_3: IC1_3.7(B1) IC2_3.9(IN-<0>) R6_3.2(B<0>) R8_3.2(B<0>)
UNNAMED_1_MAX9601_I1_IN_1_4: IC1_4.7(B1) IC2_4.9(IN-<0>) R6_4.2(B<0>) R8_4.2(B<0>)
UNNAMED_1_MAX9601_I1_IN_2: IC2_2.10(IN+<0>) R3_2.2(B<0>) R7_2.2(B<0>)
UNNAMED_1_MAX9601_I1_IN_3: IC2_3.10(IN+<0>) R3_3.2(B<0>) R7_3.2(B<0>)
UNNAMED_1_MAX9601_I1_IN_4: IC2_4.10(IN+<0>) R3_4.2(B<0>) R7_4.2(B<0>)
UNNAMED_1_MAX9601_I1_Q_1: IC2_1.2(Q*<0>) IC3_1.10(B2) R12_1.2(B<0>)
UNNAMED_1_MAX9601_I1_Q_1_1: IC2_1.1(Q<0>) IC3_1.7(B1) R14_1.2(B<0>)
UNNAMED_1_MAX9601_I1_Q_1_2: IC2_2.1(Q<0>) IC3_2.7(B1) R14_2.2(B<0>)
UNNAMED_1_MAX9601_I1_Q_1_3: IC2_3.1(Q<0>) IC3_3.7(B1) R14_3.2(B<0>)
UNNAMED_1_MAX9601_I1_Q_1_4: IC2_4.1(Q<0>) IC3_4.7(B1) R14_4.2(B<0>)
UNNAMED_1_MAX9601_I1_Q_2: IC2_2.2(Q*<0>) IC3_2.10(B2) R12_2.2(B<0>)
UNNAMED_1_MAX9601_I1_Q_3: IC2_3.2(Q*<0>) IC3_3.10(B2) R12_3.2(B<0>)
UNNAMED_1_MAX9601_I1_Q_4: IC2_4.2(Q*<0>) IC3_4.10(B2) R12_4.2(B<0>)
UNNAMED_1_MAX9601_I71_HYS_1: IC2_1.13(HYS<0>) R9_1.2(B<0>)
UNNAMED_1_MAX9601_I71_HYS_2: IC2_2.13(HYS<0>) R9_2.2(B<0>)
UNNAMED_1_MAX9601_I71_HYS_3: IC2_3.13(HYS<0>) R9_3.2(B<0>)
UNNAMED_1_MAX9601_I71_HYS_4: IC2_4.13(HYS<0>) R9_4.2(B<0>)
UNNAMED_1_OPA4277_I22_MIN: IC2.2(MIN<0>)
UNNAMED_1_OPA4277_I22_MIN_1: IC2.9(MIN<0>)
UNNAMED_1_OPA4277_I22_MIN_2: IC2.6(MIN<0>)
UNNAMED_1_OPA4277_I22_MIN_3: IC2.13(MIN<0>)
UNNAMED_1_PC036AFMCLPCCONNECT_1: J4.H5(H<5>) PX1.2(B)
UNNAMED_1_PC036AFMCLPCCONNECTOR: J4.H4(H<4>) PX1.1(A)
UNNAMED_4_74LVC1G07_I28_Y: IC4.4(Y) T1.1(G)
UNNAMED_4_74LVC1G07_I40_Y: IC6.4(Y) T2.1(G)
UNNAMED_4_CON19P_I2_A: J1.14(A<13>) T1.2(S)
UNNAMED_4_CON19P_I3_A: J2.14(A<13>) T2.2(S)
VREF: IC1.7(VREFIN/VREFOUT)
VREF_A_M2C: J4.H1(H<1>)
VTHRESH<0>: IC2.1(OUT<0>) R5_4.1(A<0>)
VTHRESH<1>: IC2.14(OUT<0>) R5_3.1(A<0>)
VTHRESH<2>: IC2.7(OUT<0>) R5_2.1(A<0>)
VTHRESH<3>: IC2.8(OUT<0>) R5_1.1(A<0>)

Pads without a net: IC4 1; IC6 1; J1 13 18 19; J2 13 18 19

## Via types
v1: diameter 0.914, hole 0.406, TOP to BOTTOM, 101 vias
v2: diameter 1.016, hole 0.5, TOP to BOTTOM, 104 vias
v3: diameter 0.61, hole 0.33, TOP to BOTTOM, 8 vias

## Routing (per net, layer and track width the routed paths; a pad name or vN(x,y) marks a point on that pad's centre or on a via; arc(x,y) is an arc through that point)
GND_SIGNAL: length 259.8
  TOP w0.4: v3(67.23,28.81) IC3_1.12 v1(64.33,28.81) 64.33,29.7 R12_1.1 ; C8_2.1 v2(80.21,37.58) ; C5_4.1 v2(133,35.88) ; IC2_2.4 89.53,37.93 89,37.4 v2(89,37.18) ; IC1_4.6 129.15,46.48 129.15,46.48 v1(129.15,46.49) ; IC3_4.8 v1(129.04,32.62) ; IC3_3.4 v1(110.04,27.55) ; 65.85,26.27 v1(64.44,26.27) ; v1(68.25,51.27) 68.25,51.28 68.34,51.38 IC1_1.14 68.34,54.23 R1_1.1 ; 111.45,23.73 112.6,23.73 112.65,23.78 v1(112.86,23.78) ; IC1_1.1 v1(65.8,46.49) ; IC1_3.16 v1(103.8,51.27) ; IC2_1.4 70.53,37.93 70,37.4 v2(70,37.18) ; C2_2.1 v2(80.21,42.38) ; IC1_3.1 v1(103.8,46.49) ; v1(110.15,51.27) 110.15,52.68 IC1_3.11 110.15,54.23 R4_3.1 ; IC1_1.3 68.34,46.38 68.35,46.38 v1(68.35,46.49) ; 122.85,26.27 v1(121.44,26.27) ; IC1_1.4 v1(69.61,46.49) ; v1(102.44,23.78) 102.65,23.78 102.69,23.73 103.85,23.73 ; R10_1.1 77.6,35.84 77.65,35.79 v2(77.65,34.88) ; R12_3.1 102.33,29.7 v1(102.33,28.81) IC3_3.12 v3(105.23,28.81) ; v1(125.25,51.27) 125.25,51.28 125.34,51.38 IC1_4.14 125.34,54.23 R1_4.1 ; R12_2.1 83.33,29.7 v1(83.33,28.81) IC3_2.12 v3(86.23,28.81) ; R6_4.1 v2(134.5,41.18) ; v2(134.65,34.88) 134.65,35.79 134.6,35.84 R10_4.1 ; v1(93.7,46.49) 93.7,46.38 93.69,46.38 IC1_2.8 ; v1(74.7,46.49) 74.7,46.38 74.69,46.38 IC1_1.8 ; R4_1.1 72.15,54.23 IC1_1.11 72.15,52.68 v1(72.15,51.27) ; v1(125.35,46.49) 125.35,46.38 125.34,46.38 IC1_4.3 ; v1(64.44,23.78) 64.65,23.78 64.69,23.73 65.85,23.73 ; C8_4.1 v2(118.21,37.58) ; R14_4.1 131.86,29.64 v1(131.86,28.88) 131.6,28.88 131.53,28.81 IC3_4.5 ; C2_4.1 v2(118.21,42.38) ; v1(83.44,23.78) 83.65,23.78 83.69,23.73 84.85,23.73 ; v1(106.25,51.27) 106.25,51.28 106.34,51.38 IC1_3.14 106.34,54.23 R1_3.1 ; v1(124.26,32.58) 124,32.58 123.95,32.62 IC3_4.9 ; IC1_3.12 v1(108.88,54.09) ; IC1_2.3 87.34,46.38 87.35,46.38 v1(87.35,46.49) ; IC3_1.6 v1(72.04,30.09) ; IC1_1.6 72.15,46.48 72.15,46.48 v1(72.15,46.49) ; IC3_1.9 66.95,32.62 67,32.58 v1(67.26,32.58) ; R4_4.1 129.15,54.23 IC1_4.11 129.15,52.68 v1(129.15,51.27) ; IC1_1.5 70.88,46.37 70.9,46.38 v1(70.9,46.49) ; IC2_3.17 v2(105.3,37.93) ; C8_3.1 v2(99.21,37.58) ; IC1_4.5 127.88,46.37 127.9,46.38 v1(127.9,46.49) ; R13_4.1 v2(119.35,33.18) ; R11_2.1 v2(79.6,35.98) ; IC1_4.8 131.69,46.38 131.7,46.38 v1(131.7,46.49) ; IC3_1.13 v1(67.26,27.55) ; IC3_4.4 v1(129.04,27.55) ; C2_3.1 v2(99.21,42.38) ; IC1_3.3 106.34,46.38 106.35,46.38 v1(106.35,46.49) ; IC1_4.16 v1(122.8,51.27) ; R1_2.1 87.34,54.23 IC1_2.14 87.34,51.38 87.25,51.28 v1(87.25,51.27) ; R11_3.1 v2(98.6,35.98) ; C3_3.1 v2(115.8,27.45) ; IC1_1.12 v1(70.88,54.09) ; IC1_3.8 112.69,46.38 112.7,46.38 v1(112.7,46.49) ; IC3_1.4 v1(72.04,27.55) ; IC1_3.6 110.15,46.48 110.15,46.48 v1(110.15,46.49) ; C6_3.1 v2(99.21,39.18) ; R7_4.1 129.5,43.28 129.8,43.58 v2(129.88,43.58) ; IC1_4.1 v1(122.8,46.49) ; IC2_4.17 v2(124.3,37.93) ; R6_3.1 v2(115.5,41.18) ; v1(93.7,54.09) 93.7,53.98 93.69,53.98 IC1_2.9 ; IC3_4.13 v1(124.26,27.55) ; 122.85,23.73 121.69,23.73 121.65,23.78 v1(121.44,23.78) ; C4_3.1 v2(112.65,33.58) ; IC2_2.17 v2(86.3,37.93) ; v1(108.9,46.49) 108.9,46.38 108.88,46.37 IC1_3.5 ; C6_4.1 v2(118.21,39.18) ; R7_3.1 110.5,43.28 110.8,43.58 v2(110.88,43.58) ; IC3_3.9 104.95,32.62 105,32.58 v1(105.26,32.58) ; R8_4.1 v2(134.35,39.28) ; v3(124.23,28.81) IC3_4.12 v1(121.33,28.81) 121.33,29.7 R12_4.1 ; IC1_1.9 74.69,53.98 74.7,53.98 v1(74.7,54.09) ; R14_2.1 93.86,29.64 v1(93.86,28.88) 93.6,28.88 93.53,28.81 IC3_2.5 ; 130.45,23.73 131.6,23.73 131.65,23.78 v1(131.86,23.78) ; IC1_4.9 131.69,53.98 131.7,53.98 v1(131.7,54.09) ; IC3_2.11 v1(86.26,30.09) ; R9_2.1 v2(80.21,40.78) ; C2_1.1 v2(61.21,42.38) ; IC3_3.11 v1(105.26,30.09) ; v1(91.15,51.27) 91.15,52.68 IC1_2.11 91.15,54.23 R4_2.1 ; C8_1.1 v2(61.21,37.58) ; R11_4.1 v2(117.6,35.98) ; IC3_3.6 v1(110.04,30.09) ; v1(93.86,23.78) 93.65,23.78 93.6,23.73 92.45,23.73 ; C5_2.1 v2(95,35.88) ; IC1_4.12 v1(127.88,54.09) ; 130.45,26.27 v1(131.86,26.27) ; C6_1.1 v2(61.21,39.18) ; R6_1.1 v2(77.5,41.18) ; R14_3.1 112.86,29.64 v1(112.86,28.88) 112.6,28.88 112.53,28.81 IC3_3.5 ; IC1_2.4 v1(88.61,46.49) ; IC1_2.16 v1(84.8,51.27) ; v1(91.15,46.49) 91.15,46.48 91.15,46.48 IC1_2.6 ; v2(96.65,34.88) 96.65,35.79 96.6,35.84 R10_2.1 ; IC1_2.1 v1(84.8,46.49) ; C5_1.1 v2(76,35.88) ; IC3_4.6 v1(129.04,30.09) ; IC1_3.4 v1(107.61,46.49) ; IC2_1.17 v2(67.3,37.93) ; v2(91.88,43.58) 91.8,43.58 91.5,43.28 R7_2.1 ; 73.45,23.73 74.6,23.73 74.65,23.78 v1(74.86,23.78) ; R9_1.1 v2(61.21,40.78) ; IC1_2.5 89.88,46.37 89.9,46.38 v1(89.9,46.49) ; 73.45,26.27 v1(74.86,26.27) ; 111.45,26.27 v1(112.86,26.27) ; R13_2.1 v2(81.35,33.18) ; R6_2.1 v2(96.5,41.18) ; IC3_2.13 v1(86.26,27.55) ; R14_1.1 74.86,29.64 v1(74.86,28.88) 74.6,28.88 74.53,28.81 IC3_1.5 ; IC1_4.13 v1(126.61,54.09) ; C3_4.1 v2(134.8,27.45) ; R7_1.1 72.5,43.28 72.8,43.58 v2(72.88,43.58) ; IC3_2.6 v1(91.04,30.09) ; IC1_2.12 v1(89.88,54.09) ; IC3_4.11 v1(124.26,30.09) ; C6_2.1 v2(80.21,39.18) ; IC1_3.9 112.69,53.98 112.7,53.98 v1(112.7,54.09) ; R11_1.1 v2(60.6,35.98) ; 103.85,26.27 v1(102.44,26.27) ; IC1_1.13 v1(69.61,54.09) ; IC3_1.11 v1(67.26,30.09) ; 92.45,26.27 v1(93.86,26.27) ; IC3_3.8 v1(110.04,32.62) ; IC3_2.9 85.95,32.62 86,32.58 v1(86.26,32.58) ; R13_1.1 v2(62.35,33.18) ; R9_3.1 v2(99.21,40.78) ; R8_3.1 v2(115.35,39.28) ; C3_2.1 v2(96.8,27.45) ; C5_3.1 v2(114,35.88) ; R8_2.1 v2(96.35,39.28) ; IC2_4.4 127.53,37.93 127,37.4 v2(127,37.18) ; IC3_2.4 v1(91.04,27.55) ; IC2_3.4 108.53,37.93 108,37.4 v2(108,37.18) ; 84.85,26.27 v1(83.44,26.27) ; R10_3.1 115.6,35.84 115.65,35.79 v2(115.65,34.88) ; R9_4.1 v2(118.21,40.78) ; IC3_2.8 v1(91.04,32.62) ; R8_1.1 v2(77.35,39.28) ; IC3_1.8 v1(72.04,32.62) ; IC1_3.13 v1(107.61,54.09) ; IC1_2.13 v1(88.61,54.09) ; C3_1.1 v2(77.8,27.45) ; C4_4.1 v2(131.65,33.58) ; IC3_3.13 v1(105.26,27.55) ; IC1_4.4 v1(126.61,46.49) ; R13_3.1 v2(100.35,33.18) ; C4_2.1 v2(93.65,33.58) ; IC1_1.16 v1(65.8,51.27) ; C4_1.1 v2(74.65,33.58)
  BOTTOM w0.4: v2(73.11,42.46) 72.48,41.83 C7_1.1 ; C9_1.1 71.5,37.18 v2(70,37.18) ; v2(84.45,42.98) 84.62,42.98 85,42.61 C10_2.1 ; v2(111.11,42.46) 110.48,41.83 C7_3.1 ; C9_4.1 128.5,37.18 v2(127,37.18) ; C7_2.1 91.48,41.83 v2(92.11,42.46) ; v2(122.45,42.98) 122.62,42.98 123,42.61 C10_4.1 ; v2(103.45,42.98) 103.62,42.98 104,42.61 C10_3.1 ; C9_3.1 109.5,37.18 v2(108,37.18) ; C9_2.1 90.5,37.18 v2(89,37.18) ; C10_1.1 66,42.61 65.62,42.98 v2(65.45,42.98) ; C7_4.1 129.48,41.83 v2(130.11,42.46)
P2V5: length 56.9
  TOP w0.2: IC2_2.5 91.5,38.58 91.86,38.21 91.86,38.11 92,37.98 92,37.43 v2(92.25,37.18) ; IC2_4.16 121.8,38.58 121.46,38.24 121.41,38.24 120.8,37.63 ; IC2_3.5 110.5,38.58 110.86,38.21 110.86,38.11 111,37.98 111,37.43 v2(111.25,37.18) ; IC2_3.16 102.8,38.58 102.46,38.24 102.41,38.24 101.8,37.63 ; 82.8,37.63 83.41,38.24 83.46,38.24 83.8,38.58 IC2_2.16 ; 63.8,37.63 64.41,38.24 64.46,38.24 64.8,38.58 IC2_1.16 ; IC2_1.5 72.5,38.58 72.86,38.21 72.86,38.11 73,37.98 73,37.43 v2(73.25,37.18) ; v2(130.25,37.18) 130,37.43 130,37.98 129.86,38.11 129.86,38.21 129.5,38.58 IC2_4.5
  TOP w0.4: 101.8,37.63 C8_3.2 102.1,37.28 IC2_3.18 104.77,37.28 104.95,37.09 105.03,37.09 v2(105.45,36.68) ; v2(86.45,36.68) 86.03,37.09 85.95,37.09 85.77,37.28 IC2_2.18 83.1,37.28 C8_2.2 82.8,37.63 ; C5_2.2 v2(92.25,37.18) 91.96,37.18 91.86,37.28 IC2_2.3 ; C5_1.2 v2(73.25,37.18) 72.96,37.18 72.86,37.28 IC2_1.3 ; v2(96.8,31.12) C3_2.2 ; 120.8,37.63 C8_4.2 121.1,37.28 IC2_4.18 123.77,37.28 123.95,37.09 124.03,37.09 v2(124.45,36.68) ; v2(77.8,31.12) C3_1.2 ; 63.8,37.63 C8_1.2 64.1,37.28 IC2_1.18 66.77,37.28 66.95,37.09 67.03,37.09 v2(67.45,36.68) ; IC2_4.3 129.86,37.28 129.96,37.18 v2(130.25,37.18) C5_4.2 ; v2(115.8,31.12) C3_3.2 ; C5_3.2 v2(111.25,37.18) 110.96,37.18 110.86,37.28 IC2_3.3 ; v2(134.8,31.12) C3_4.2
  BOTTOM w0.4: 73.45,28.88 v3(72.05,28.88) ; 111.45,28.88 v3(110.05,28.88) ; 130.45,28.88 v3(129.05,28.88) ; 92.45,28.88 v3(91.05,28.88)
P5V: length 42.1
  TOP w0.4: v2(108.25,40.16) 108.53,39.88 IC2_3.7 ; IC2_4.7 127.53,39.88 v2(127.25,40.16) ; v2(70.7,57.68) 70.65,57.73 C1_1.2 69.25,57.93 D1_1.2 ; D1_3.2 107.25,57.93 C1_3.2 108.65,57.73 v2(108.7,57.68) ; v2(70.25,40.16) 70.53,39.88 IC2_1.7 ; C4_3.2 v2(116.2,33.58) ; IC2_2.7 89.53,39.88 v2(89.25,40.16) ; v1(105.4,40.25) 105.16,40.02 105.1,40.02 104.97,39.88 IC2_3.14 ; v1(86.4,40.25) 86.16,40.02 86.1,40.02 85.97,39.88 IC2_2.14 ; IC2_1.14 66.97,39.88 67.1,40.02 67.16,40.02 v1(67.4,40.25) ; v2(127.7,57.68) 127.65,57.73 C1_4.2 126.25,57.93 D1_4.2 ; C4_1.2 v2(78.2,33.58) ; IC2_4.14 123.97,39.88 124.1,40.02 124.16,40.02 v1(124.4,40.25) ; D1_2.2 88.25,57.93 C1_2.2 89.65,57.73 v2(89.7,57.68) ; C4_2.2 v2(97.2,33.58) ; C4_4.2 v2(135.2,33.58)
  BOTTOM w0.4: v2(127.25,40.16) 127.48,40.16 127.9,40.58 128.4,40.58 C7_4.2 ; C10_2.2 85.07,40.25 v1(86.4,40.25) ; C10_1.2 66.07,40.25 v1(67.4,40.25) ; v2(108.25,40.16) 108.48,40.16 108.9,40.58 109.4,40.58 C7_3.2 ; C7_2.2 90.4,40.58 89.9,40.58 89.48,40.16 v2(89.25,40.16) ; C10_3.2 104.07,40.25 v1(105.4,40.25) ; C10_4.2 123.07,40.25 v1(124.4,40.25) ; C7_1.2 71.4,40.58 70.9,40.58 70.48,40.16 v2(70.25,40.16)
BEAM_TRIGGER*<0>: length 9.1
  TOP w0.2: 120.18,32.83 120.18,33.53 120.1,33.61 R11_4.2
  TOP w0.4: R11_4.2 120.9,35.98 121.55,36.63 IC2_4.19 ; 120.18,32.83 120.18,32.71 119.15,31.68 119.15,30.33
BEAM_TRIGGER*<1>: length 9.1
  TOP w0.2: R11_3.2 101.1,33.61 101.18,33.53 101.18,32.83
  TOP w0.4: IC2_3.19 102.55,36.63 101.9,35.98 R11_3.2 ; 101.18,32.83 101.18,32.71 100.15,31.68 100.15,30.33
BEAM_TRIGGER*<2>: length 9.1
  TOP w0.2: 82.18,32.83 82.18,33.53 82.1,33.61 R11_2.2
  TOP w0.4: IC2_2.19 83.55,36.63 82.9,35.98 R11_2.2 ; 82.18,32.83 82.18,32.71 81.15,31.68 81.15,30.33
BEAM_TRIGGER*<3>: length 9.1
  TOP w0.2: 63.18,32.83 63.18,33.53 63.1,33.61 R11_1.2
  TOP w0.4: 62.15,30.33 62.15,31.68 63.18,32.71 63.18,32.83 ; IC2_1.19 64.55,36.63 63.9,35.98 R11_1.2
BEAM_TRIGGER<0>: length 7.2
  TOP w0.4: 119.9,30.38 119.9,31.58 120.85,32.53 R13_4.2 120.85,34.43 121.69,35.27 121.69,35.56 122.11,35.98 IC2_4.20
BEAM_TRIGGER<1>: length 7.2
  TOP w0.4: 100.9,30.38 100.9,31.58 101.85,32.53 R13_3.2 101.85,34.43 102.69,35.27 102.69,35.56 103.11,35.98 IC2_3.20
BEAM_TRIGGER<2>: length 7.2
  TOP w0.4: IC2_2.20 84.11,35.98 83.69,35.56 83.69,35.27 82.85,34.43 R13_2.2 82.85,32.53 81.9,31.58 81.9,30.38
BEAM_TRIGGER<3>: length 7.2
  TOP w0.4: 62.9,30.38 62.9,31.58 63.85,32.53 R13_1.2 63.85,34.43 64.69,35.27 64.69,35.56 65.11,35.98 IC2_1.20
BEAM_TRIGGER_CFD*<0>: length 6.6
  TOP w0.4: 126,21.23 126,24.38 125.37,25 IC3_4.15
BEAM_TRIGGER_CFD*<1>: length 6.6
  TOP w0.4: 107,21.23 107,24.38 106.37,25 IC3_3.15
BEAM_TRIGGER_CFD*<2>: length 6.6
  TOP w0.4: 88,21.23 88,24.38 87.37,25 IC3_2.15
BEAM_TRIGGER_CFD*<3>: length 6.6
  TOP w0.4: IC3_1.15 68.37,25 69,24.38 69,21.23
BEAM_TRIGGER_CFD<0>: length 7
  TOP w0.4: IC3_4.2 127.42,25 126.8,24.38 126.8,21.28
BEAM_TRIGGER_CFD<1>: length 7
  TOP w0.4: 107.8,21.28 107.8,24.38 108.42,25 IC3_3.2
BEAM_TRIGGER_CFD<2>: length 7
  TOP w0.4: 88.8,21.28 88.8,24.38 89.42,25 IC3_2.2
BEAM_TRIGGER_CFD<3>: length 7
  TOP w0.4: IC3_1.2 70.42,25 69.8,24.38 69.8,21.28
BUS_GND: length 1.1
  TOP w0.25: U1.3 v1(9.17,65.4)
BUSY1: length 5.3
  TOP w0.17: J1.7 13.55,67.7 13,67.15 13,65.15 13.75,64.4
BUSY1*: length 4.8
  TOP w0.17: 13.75,64.95 13.35,65.35 13.35,66.94 14.35,67.93 J1.9
CLK1: length 3.5
  TOP w0.17: 11.1,66 11.65,66.55 11.65,67.6 11.95,67.9 J1.3
CLK1*: length 1.7
  TOP w0.17: 11.32,67.58 11.15,67.75 J1.1
CONT1: length 4.7
  TOP w0.17: 11.32,64.85 12,65.52 12,67.4 12.35,67.75 J1.4
CONT1*: length 5.5
  TOP w0.17: 11.5,64.4 12.45,65.35 12.45,67.24 13.15,67.93 J1.6
M5V: length 39.4
  TOP w0.4: C6_1.2 63.85,39.23 IC2_1.15 67.38,39.23 v2(67.45,39.16) ; C6_2.2 82.85,39.23 IC2_2.15 86.38,39.23 v2(86.45,39.16) ; v2(108.25,38.95) 108.53,39.23 IC2_3.6 ; IC2_4.6 127.53,39.23 v2(127.25,38.95) ; D1_4.1 125.97,56.03 126.25,56.11 126.37,56.23 C1_4.1 v2(127.65,56.23) ; v2(89.25,38.95) 89.53,39.23 IC2_2.6 ; v2(124.45,39.16) 124.38,39.23 IC2_4.15 120.85,39.23 C6_4.2 ; D1_1.1 68.97,56.03 69.25,56.11 69.37,56.23 C1_1.1 v2(70.65,56.23) ; v2(70.25,38.95) 70.53,39.23 IC2_1.6 ; D1_3.1 106.97,56.03 107.25,56.11 107.37,56.23 C1_3.1 v2(108.65,56.23) ; C6_3.2 101.85,39.23 IC2_3.15 105.38,39.23 v2(105.45,39.16) ; D1_2.1 87.97,56.03 88.25,56.11 88.37,56.23 C1_2.1 v2(89.65,56.23)
  BOTTOM w0.4: C9_4.2 128.6,38.48 127.75,38.48 127.28,38.95 v2(127.25,38.95) ; v2(108.25,38.95) 108.28,38.95 108.75,38.48 109.6,38.48 C9_3.2 ; v2(70.25,38.95) 70.28,38.95 70.75,38.48 71.6,38.48 C9_1.2 ; v2(89.25,38.95) 89.28,38.95 89.75,38.48 90.6,38.48 C9_2.2
SPARE1: length 3.6
  TOP w0.17: J1.10 14.75,67.7 13.7,66.65 13.7,66.05
SPARE1*: length 2.8
  TOP w0.17: 14.65,66.75 14.65,66.85 15.55,67.75 J1.12
UNNAMED_1_CAPCERSMDCL2_I78_B_1: length 5.3
  TOP w0.2: R5_1.2 62.67,44.23 63.8,43.11 C2_1.2 64.56,42.38 65.11,41.83 IC2_1.11
UNNAMED_1_CAPCERSMDCL2_I78_B_2: length 5.3
  TOP w0.2: R5_2.2 81.67,44.23 82.8,43.11 C2_2.2 83.56,42.38 84.11,41.83 IC2_2.11
UNNAMED_1_CAPCERSMDCL2_I78_B_3: length 5.3
  TOP w0.2: R5_3.2 100.67,44.23 101.8,43.11 C2_3.2 102.56,42.38 103.11,41.83 IC2_3.11
UNNAMED_1_CAPCERSMDCL2_I78_B_4: length 5.3
  TOP w0.2: R5_4.2 119.67,44.23 120.8,43.11 C2_4.2 121.56,42.38 122.11,41.83 IC2_4.11
UNNAMED_1_DELAYLINEGL2L_I14_1_1: length 1.9
  TOP w0.4: IC1_1.15 67.07,54.36 R1_1.2
UNNAMED_1_DELAYLINEGL2L_I14_1_2: length 1.9
  TOP w0.4: R1_2.2 86.07,54.36 IC1_2.15
UNNAMED_1_DELAYLINEGL2L_I14_1_3: length 1.9
  TOP w0.4: R1_3.2 105.07,54.36 IC1_3.15
UNNAMED_1_DELAYLINEGL2L_I14_1_4: length 1.9
  TOP w0.4: IC1_4.15 124.07,54.36 R1_4.2
UNNAMED_1_DELAYLINEGL2L_I14_2_1: length 1.9
  TOP w0.4: R4_1.2 73.4,53.95 73.42,53.93 IC1_1.10
UNNAMED_1_DELAYLINEGL2L_I14_2_2: length 1.9
  TOP w0.4: IC1_2.10 92.42,53.93 92.4,53.95 R4_2.2
UNNAMED_1_DELAYLINEGL2L_I14_2_3: length 1.9
  TOP w0.4: IC1_3.10 111.42,53.93 111.4,53.95 R4_3.2
UNNAMED_1_DELAYLINEGL2L_I14_2_4: length 1.9
  TOP w0.4: R4_4.2 130.4,53.95 130.42,53.93 IC1_4.10
UNNAMED_1_DELAYLINEGL2L_I140__1: length 21.5
  TOP w0.2: IC2_1.12 66.91,41.18 67.07,41.34 67.07,43.26 ; 67.07,43.26 IC1_1.2 ; 67.07,43.26 R3_1.1
  TOP w0.4: R2_1.2 65.55,59.25 65.5,59.2 D1_1.3 65.5,54.43 64.45,53.38 64.45,49.48 67.07,46.86 IC1_1.2
UNNAMED_1_DELAYLINEGL2L_I140__2: length 21.5
  TOP w0.2: 86.07,43.26 R3_2.1 ; 86.07,43.26 86.07,41.34 85.91,41.18 IC2_2.12 ; 86.07,43.26 IC1_2.2
  TOP w0.4: R2_2.2 84.55,59.25 84.5,59.2 D1_2.3 84.5,54.43 83.45,53.38 83.45,49.48 86.07,46.86 IC1_2.2
UNNAMED_1_DELAYLINEGL2L_I140__3: length 21.5
  TOP w0.2: IC2_3.12 104.91,41.18 105.07,41.34 105.07,43.26 ; 105.07,43.26 IC1_3.2 ; 105.07,43.26 R3_3.1
  TOP w0.4: R2_3.2 103.55,59.25 103.5,59.2 D1_3.3 103.5,54.43 102.45,53.38 102.45,49.48 105.07,46.86 IC1_3.2
UNNAMED_1_DELAYLINEGL2L_I140__4: length 21.5
  TOP w0.2: 124.07,43.26 124.07,41.34 123.91,41.18 IC2_4.12 ; 124.07,43.26 IC1_4.2 ; 124.07,43.26 R3_4.1
  TOP w0.4: R2_4.2 122.55,59.25 122.5,59.2 D1_4.3 122.5,54.43 121.45,53.38 121.45,49.48 124.07,46.86 IC1_4.2
UNNAMED_1_MAX9601_I1_HYS_1: length 8.1
  TOP w0.2: IC2_1.8 72.85,40.53 73.25,40.13 73.25,38.42 73.53,38.14 76.94,38.14 77.55,37.53 R10_1.2
UNNAMED_1_MAX9601_I1_HYS_2: length 8.1
  TOP w0.2: R10_2.2 96.55,37.53 95.94,38.14 92.53,38.14 92.25,38.42 92.25,40.13 91.85,40.53 IC2_2.8
UNNAMED_1_MAX9601_I1_HYS_3: length 8.1
  TOP w0.2: IC2_3.8 110.85,40.53 111.25,40.13 111.25,38.42 111.53,38.14 114.94,38.14 115.55,37.53 R10_3.2
UNNAMED_1_MAX9601_I1_HYS_4: length 8.1
  TOP w0.2: IC2_4.8 129.85,40.53 130.25,40.13 130.25,38.42 130.53,38.14 133.94,38.14 134.55,37.53 R10_4.2
UNNAMED_1_MAX9601_I1_IN_1: length 3.9
  TOP w0.2: R3_1.2 69.52,43.18 69.62,43.28 R7_1.2 70.3,43.23 70.91,42.62 70.96,42.62 IC2_1.10
UNNAMED_1_MAX9601_I1_IN_1_1: length 8.8
  TOP w0.2: R8_1.2 R6_1.2 74.35,41.28 74.25,41.18 IC2_1.9
  TOP w0.4: IC1_1.7 73.42,44.58 74.35,43.66 74.35,41.28
UNNAMED_1_MAX9601_I1_IN_1_2: length 8.8
  TOP w0.2: R8_2.2 R6_2.2 93.35,41.28 93.25,41.18 IC2_2.9
  TOP w0.4: 93.35,41.28 93.35,43.66 92.42,44.58 IC1_2.7
UNNAMED_1_MAX9601_I1_IN_1_3: length 8.8
  TOP w0.2: R8_3.2 R6_3.2 112.35,41.28 112.25,41.18 IC2_3.9
  TOP w0.4: IC1_3.7 111.42,44.58 112.35,43.66 112.35,41.28
UNNAMED_1_MAX9601_I1_IN_1_4: length 8.8
  TOP w0.2: IC2_4.9 131.25,41.18 131.35,41.28 R6_4.2 R8_4.2
  TOP w0.4: 131.35,41.28 131.35,43.66 130.42,44.58 IC1_4.7
UNNAMED_1_MAX9601_I1_IN_2: length 3.9
  TOP w0.2: R3_2.2 88.52,43.18 88.62,43.28 R7_2.2 89.3,43.23 89.91,42.62 89.96,42.62 IC2_2.10
UNNAMED_1_MAX9601_I1_IN_3: length 3.9
  TOP w0.2: IC2_3.10 108.96,42.62 108.91,42.62 108.3,43.23 R7_3.2 107.62,43.28 107.52,43.18 R3_3.2
UNNAMED_1_MAX9601_I1_IN_4: length 3.9
  TOP w0.2: R3_4.2 126.52,43.18 126.62,43.28 R7_4.2 127.3,43.23 127.91,42.62 127.96,42.62 IC2_4.10
UNNAMED_1_MAX9601_I1_Q_1: length 11.2
  TOP w0.127: 64.22,31.35 R12_1.2
  TOP w0.2: IC3_1.10 64.22,31.35
  TOP w0.4: IC2_1.2 70.63,36.63 70.34,36.34 70.25,36.34 68.9,35 68.9,32.53 67.75,31.38 67.02,31.38 67,31.35 IC3_1.10
UNNAMED_1_MAX9601_I1_Q_1_1: length 10.5
  TOP w0.127: 75.02,31.35 R14_1.2
  TOP w0.2: IC3_1.7 75.02,31.35
  TOP w0.4: IC2_1.1 71.05,35.98 69.7,34.63 69.7,32.63 70.95,31.38 72.27,31.38 72.3,31.35 IC3_1.7
UNNAMED_1_MAX9601_I1_Q_1_2: length 10.5
  TOP w0.127: 94.02,31.35 R14_2.2
  TOP w0.2: IC3_2.7 94.02,31.35
  TOP w0.4: IC2_2.1 90.05,35.98 88.7,34.63 88.7,32.63 89.95,31.38 91.27,31.38 91.3,31.35 IC3_2.7
UNNAMED_1_MAX9601_I1_Q_1_3: length 10.5
  TOP w0.127: 113.02,31.35 R14_3.2
  TOP w0.2: IC3_3.7 113.02,31.35
  TOP w0.4: IC2_3.1 109.05,35.98 107.7,34.63 107.7,32.63 108.95,31.38 110.27,31.38 110.3,31.35 IC3_3.7
UNNAMED_1_MAX9601_I1_Q_1_4: length 10.5
  TOP w0.127: 132.02,31.35 R14_4.2
  TOP w0.2: IC3_4.7 132.02,31.35
  TOP w0.4: IC3_4.7 129.3,31.35 129.27,31.38 127.95,31.38 126.7,32.63 126.7,34.63 128.05,35.98 IC2_4.1
UNNAMED_1_MAX9601_I1_Q_2: length 11.2
  TOP w0.127: 83.22,31.35 R12_2.2
  TOP w0.2: IC3_2.10 83.22,31.35
  TOP w0.4: IC2_2.2 89.63,36.63 89.34,36.34 89.25,36.34 87.9,35 87.9,32.53 86.75,31.38 86.02,31.38 86,31.35 IC3_2.10
UNNAMED_1_MAX9601_I1_Q_3: length 11.2
  TOP w0.127: 102.22,31.35 R12_3.2
  TOP w0.2: IC3_3.10 102.22,31.35
  TOP w0.4: IC2_3.2 108.63,36.63 108.34,36.34 108.25,36.34 106.9,35 106.9,32.53 105.75,31.38 105.02,31.38 105,31.35 IC3_3.10
UNNAMED_1_MAX9601_I1_Q_4: length 11.2
  TOP w0.127: 121.22,31.35 R12_4.2
  TOP w0.2: IC3_4.10 121.22,31.35
  TOP w0.4: IC3_4.10 124,31.35 124.02,31.38 124.75,31.38 125.9,32.53 125.9,35 127.25,36.34 127.34,36.34 127.63,36.63 IC2_4.2
UNNAMED_1_MAX9601_I71_HYS_1: length 2.1
  TOP w0.2: IC2_1.13 64.05,40.53 R9_1.2
UNNAMED_1_MAX9601_I71_HYS_2: length 2.1
  TOP w0.2: IC2_2.13 83.05,40.53 R9_2.2
UNNAMED_1_MAX9601_I71_HYS_3: length 2.1
  TOP w0.2: IC2_3.13 102.05,40.53 R9_3.2
UNNAMED_1_MAX9601_I71_HYS_4: length 2.1
  TOP w0.2: IC2_4.13 121.05,40.53 R9_4.2
VTHRESH<0>: length 2.9
  TOP w0.2: R5_4.1 118.95,48.68
VTHRESH<1>: length 2.9
  TOP w0.2: R5_3.1 99.95,48.68
VTHRESH<2>: length 2.9
  TOP w0.2: R5_2.1 80.95,48.68
VTHRESH<3>: length 2.9
  TOP w0.2: R5_1.1 61.95,48.68

## Copper pours and planes (outline as drawn; the poured copper is in the pictures)
GND_SIGNAL on LAYER2 (solid shape): outline of 646 points within 59.9,20.38 78.95,61.48
GND_SIGNAL on LAYER2 (solid shape): outline of 656 points within 78.9,20.38 97.95,61.48
GND_SIGNAL on LAYER2 (solid shape): outline of 656 points within 97.9,20.38 116.95,61.48
GND_SIGNAL on LAYER2 (solid shape): outline of 656 points within 116.9,20.38 135.95,61.48
GND_SIGNAL on LAYER5 (solid shape): outline of 646 points within 59.9,20.38 78.95,61.48
GND_SIGNAL on LAYER5 (solid shape): outline of 656 points within 78.9,20.38 97.95,61.48
GND_SIGNAL on LAYER5 (solid shape): outline of 656 points within 97.9,20.38 116.95,61.48
GND_SIGNAL on LAYER5 (solid shape): outline of 656 points within 116.9,20.38 135.95,61.48
P2V5 on BOTTOM (solid shape): outline of 2842 points within 116.9,20.38 135.95,61.48
P2V5 on BOTTOM (solid shape): outline of 2845 points within 59.9,20.38 78.95,61.48
P2V5 on BOTTOM (solid shape): outline of 2855 points within 78.9,20.38 97.95,61.48
P2V5 on BOTTOM (solid shape): outline of 2855 points within 97.9,20.38 116.95,61.48
P5V on LAYER3 (solid shape): outline of 2873 points within 116.9,20.38 135.95,61.48
P5V on LAYER3 (solid shape): outline of 2886 points within 59.9,20.38 78.95,61.48
P5V on LAYER3 (solid shape): outline of 2886 points within 78.9,20.38 97.95,61.48
P5V on LAYER3 (solid shape): outline of 2886 points within 97.9,20.38 116.95,61.48
(no net) on BOTTOM: 116.9,20.38 135.95,20.38 135.95,61.48 116.9,61.48
(no net) on BOTTOM: 78.9,20.38 97.95,20.38 97.95,61.48 78.9,61.48
(no net) on BOTTOM: 97.9,20.38 116.95,20.38 116.95,61.48 97.9,61.48
(no net) on BOTTOM: 59.9,20.38 78.95,20.38 78.95,61.48 59.9,61.48
(no net) on LAYER2, LAYER3, LAYER4, LAYER5: 59.9,61.48 59.9,20.38 78.95,20.38 78.95,61.48
(no net) on LAYER2, LAYER3, LAYER4, LAYER5: 97.9,61.48 97.9,20.38 116.95,20.38 116.95,61.48
(no net) on LAYER2, LAYER3, LAYER4, LAYER5: 78.9,61.48 78.9,20.38 97.95,20.38 97.95,61.48
(no net) on LAYER2, LAYER3, LAYER4, LAYER5: 116.9,61.48 116.9,20.38 135.95,20.38 135.95,61.48
M5V on LAYER4 (solid shape): outline of 2952 points within 116.9,20.38 135.95,61.48
M5V on LAYER4 (solid shape): outline of 2955 points within 59.9,20.38 78.95,61.48
M5V on LAYER4 (solid shape): outline of 2965 points within 78.9,20.38 97.95,61.48
